# Altium PCB Bracelet.PcbDoc
Units mm, origin at the board's own origin, x right, y up, seen from the top; angles counter-clockwise.
Board outline 55 x 50 mm, 4 copper layers (Top Layer, Internal Plane 1, Internal Plane 2, Bottom Layer), stack 0.462 mm thick; 36 components, 54 nets, 165 pads, 80 vias.
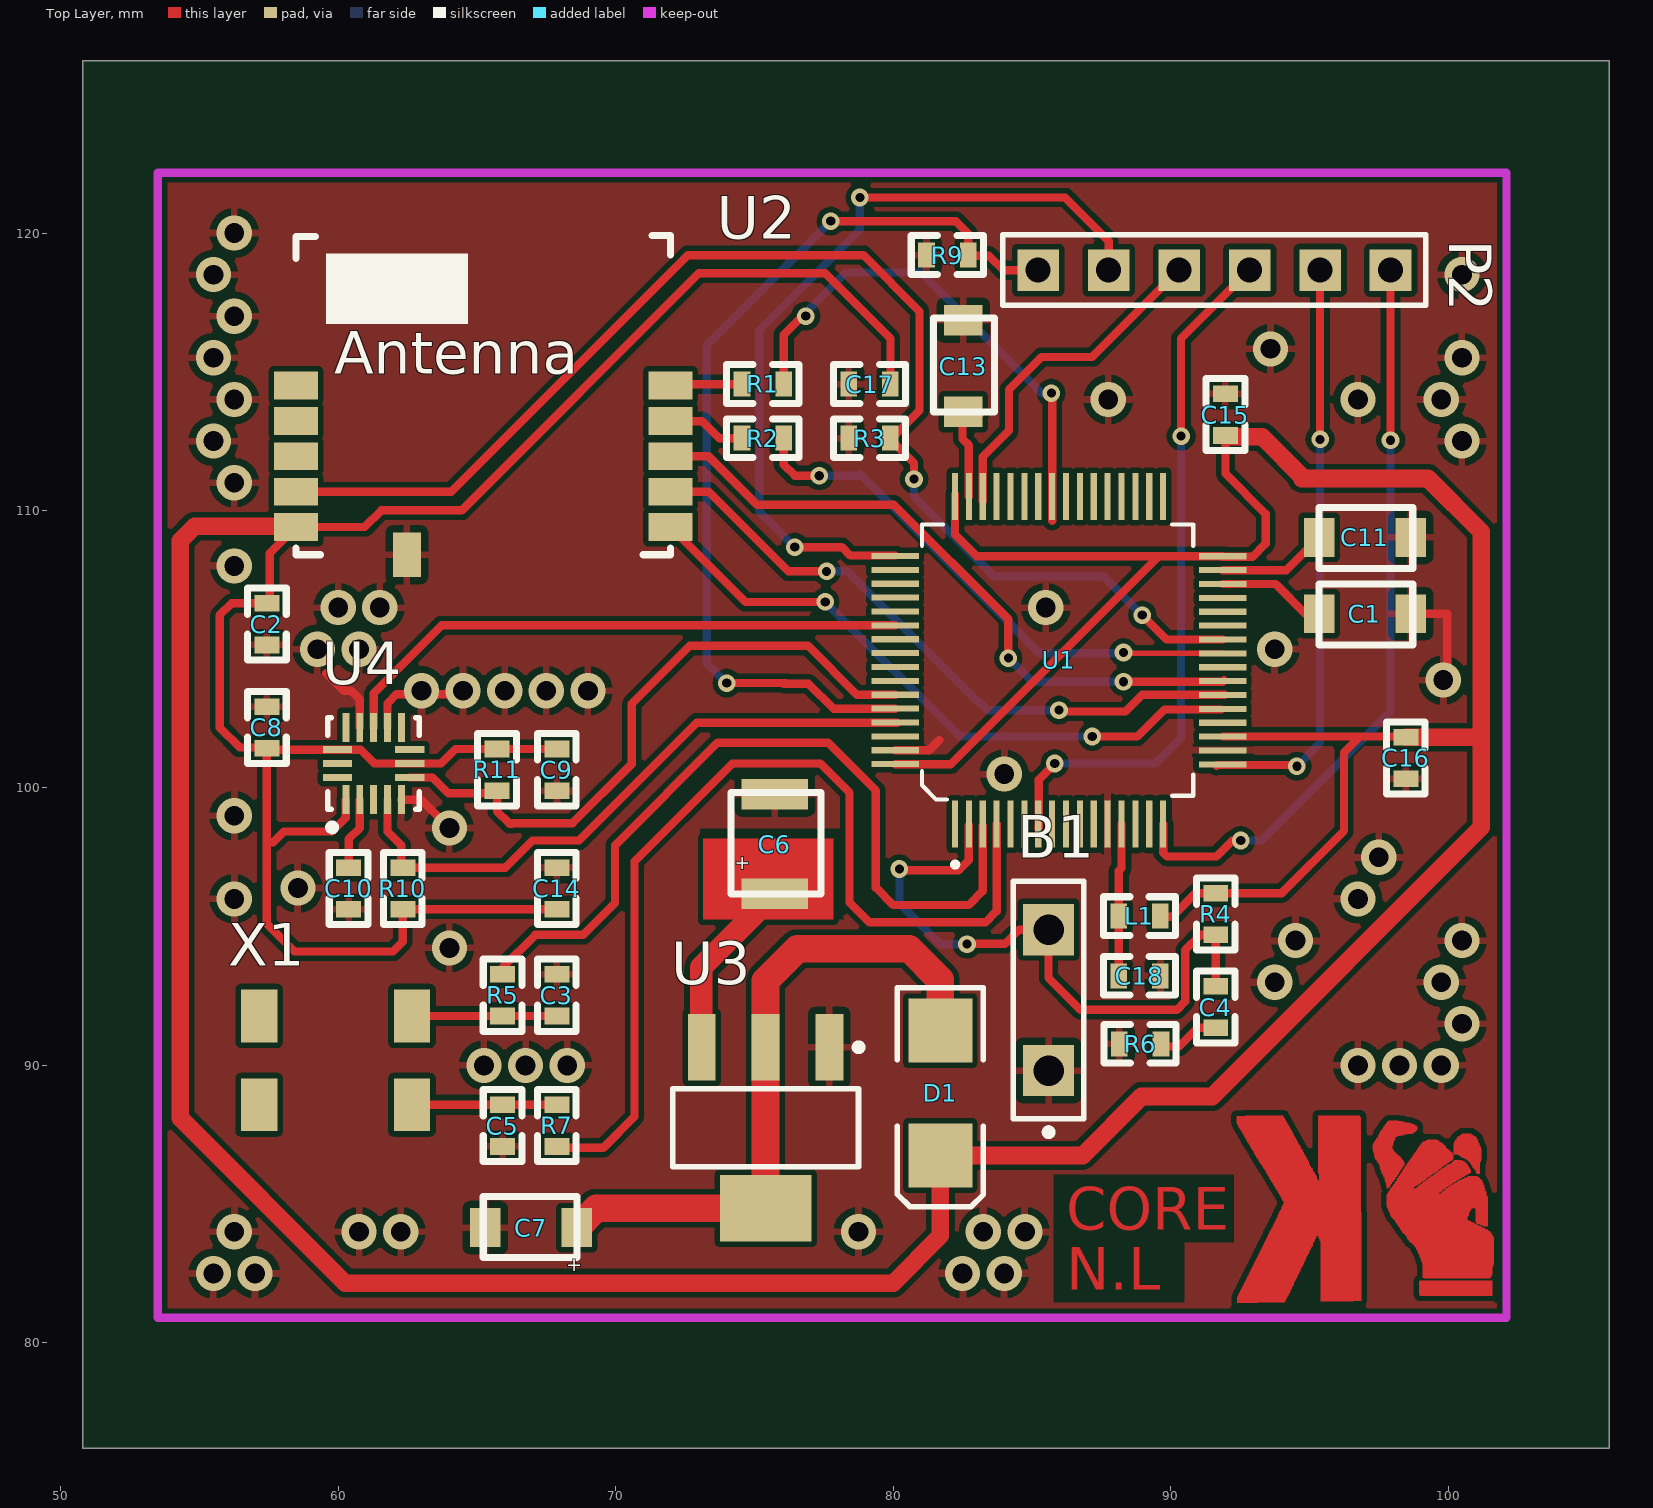
[diagram p0: Top Layer view]
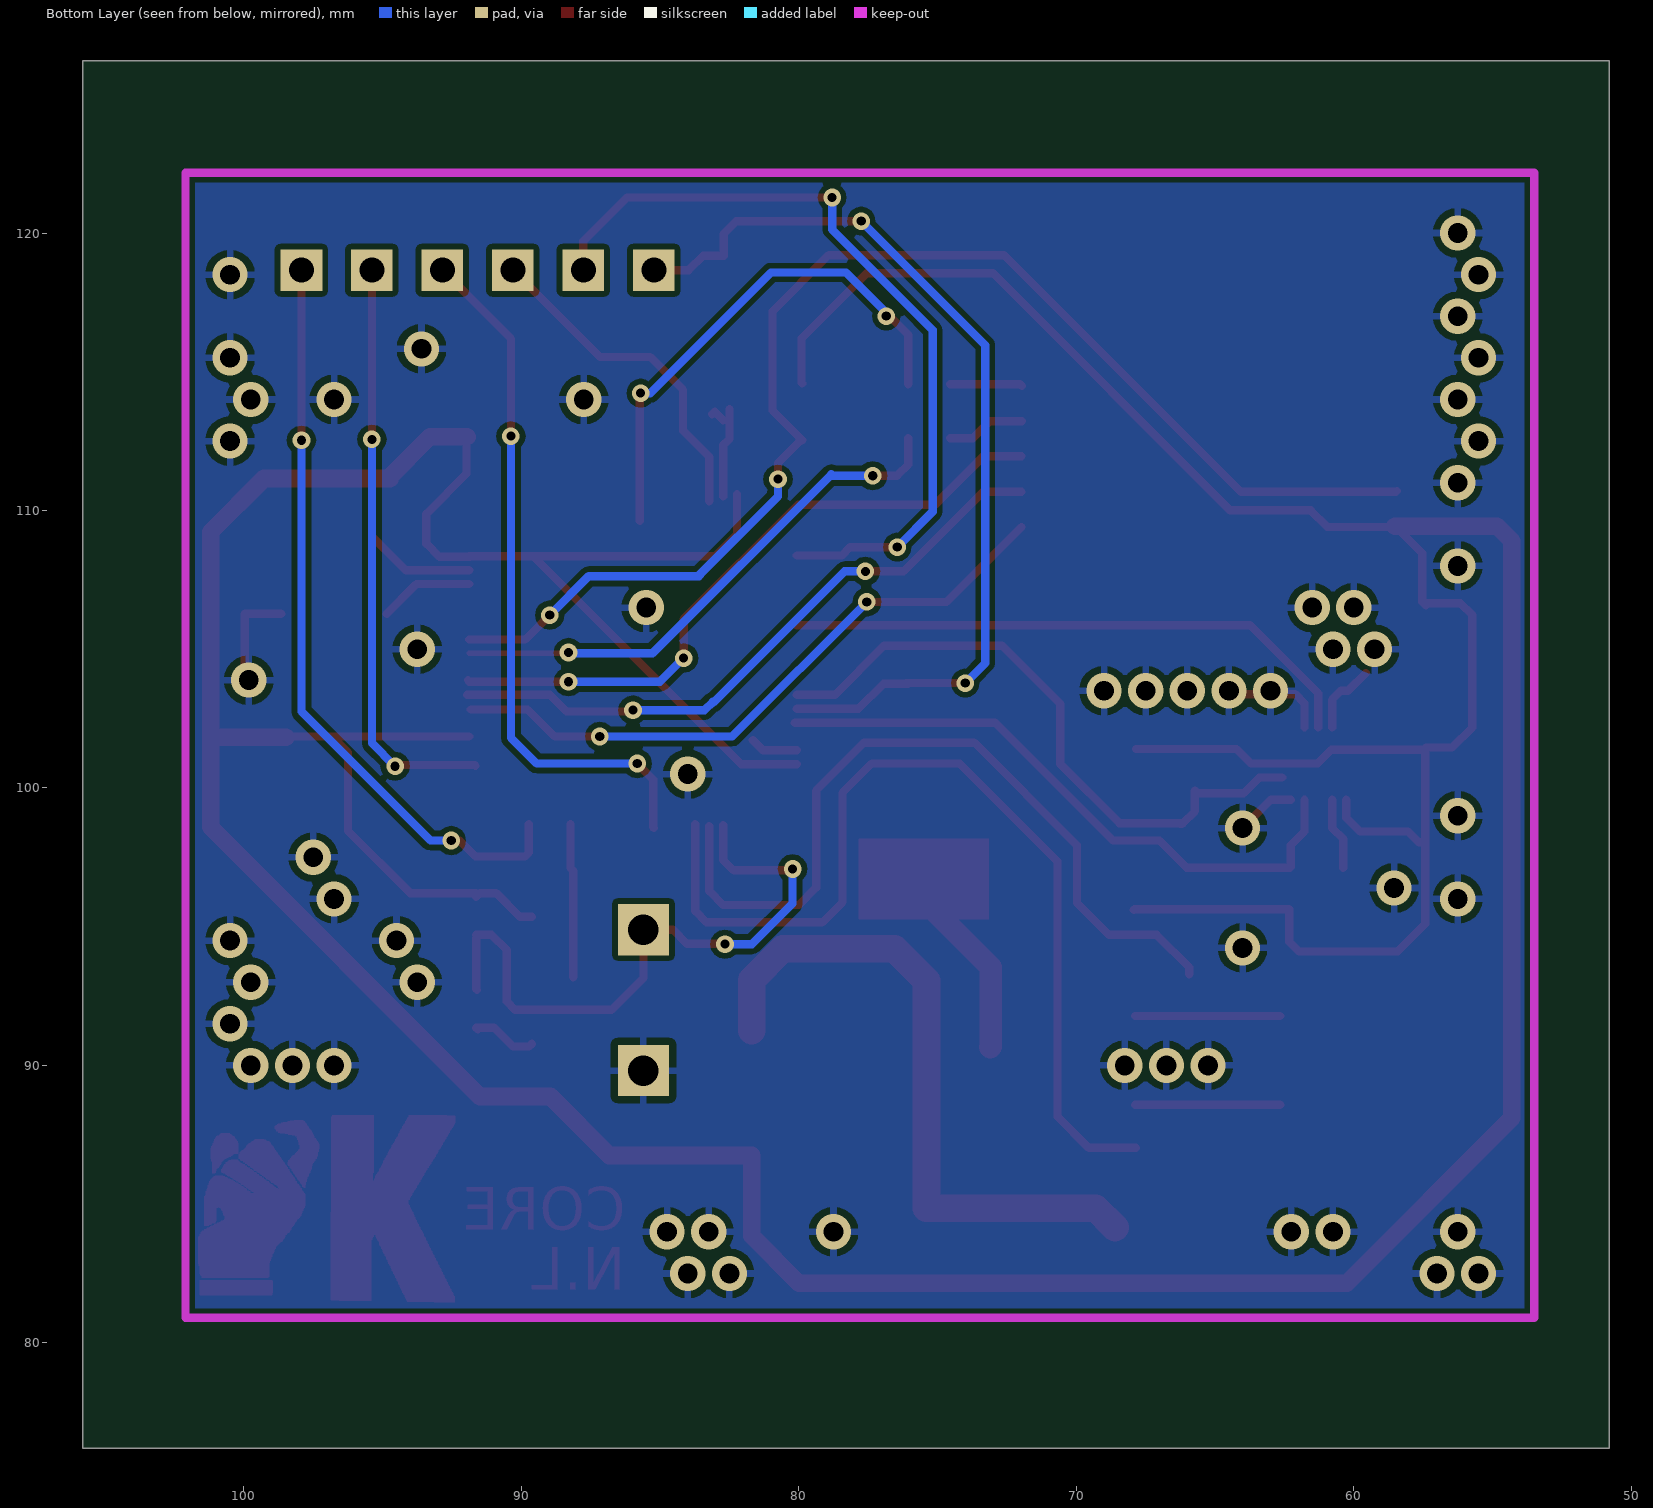
[diagram p1: Bottom Layer view, seen from below]
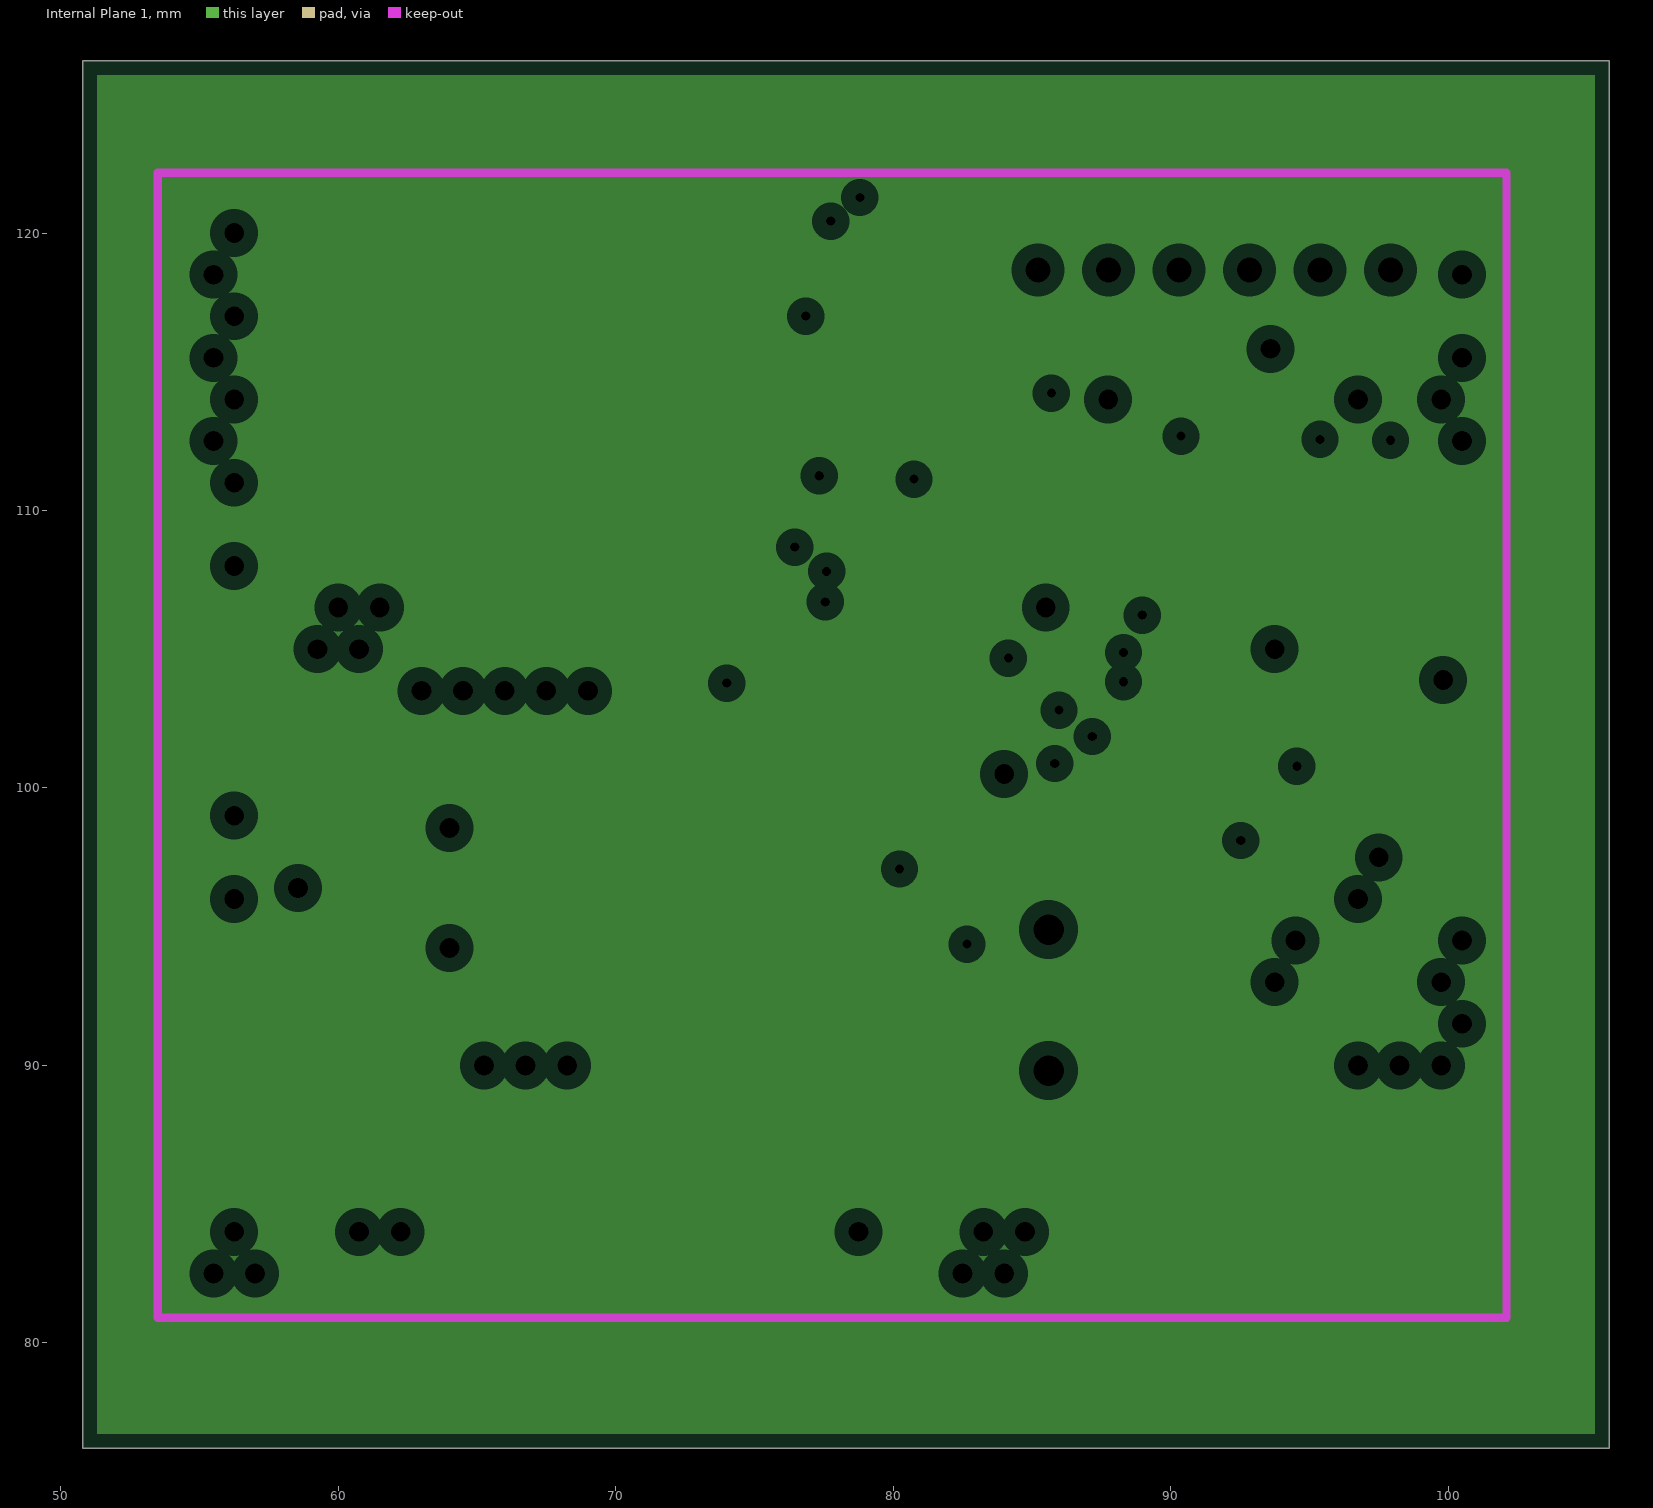
[diagram p2: Internal Plane 1, clearances drawn from the general rule]
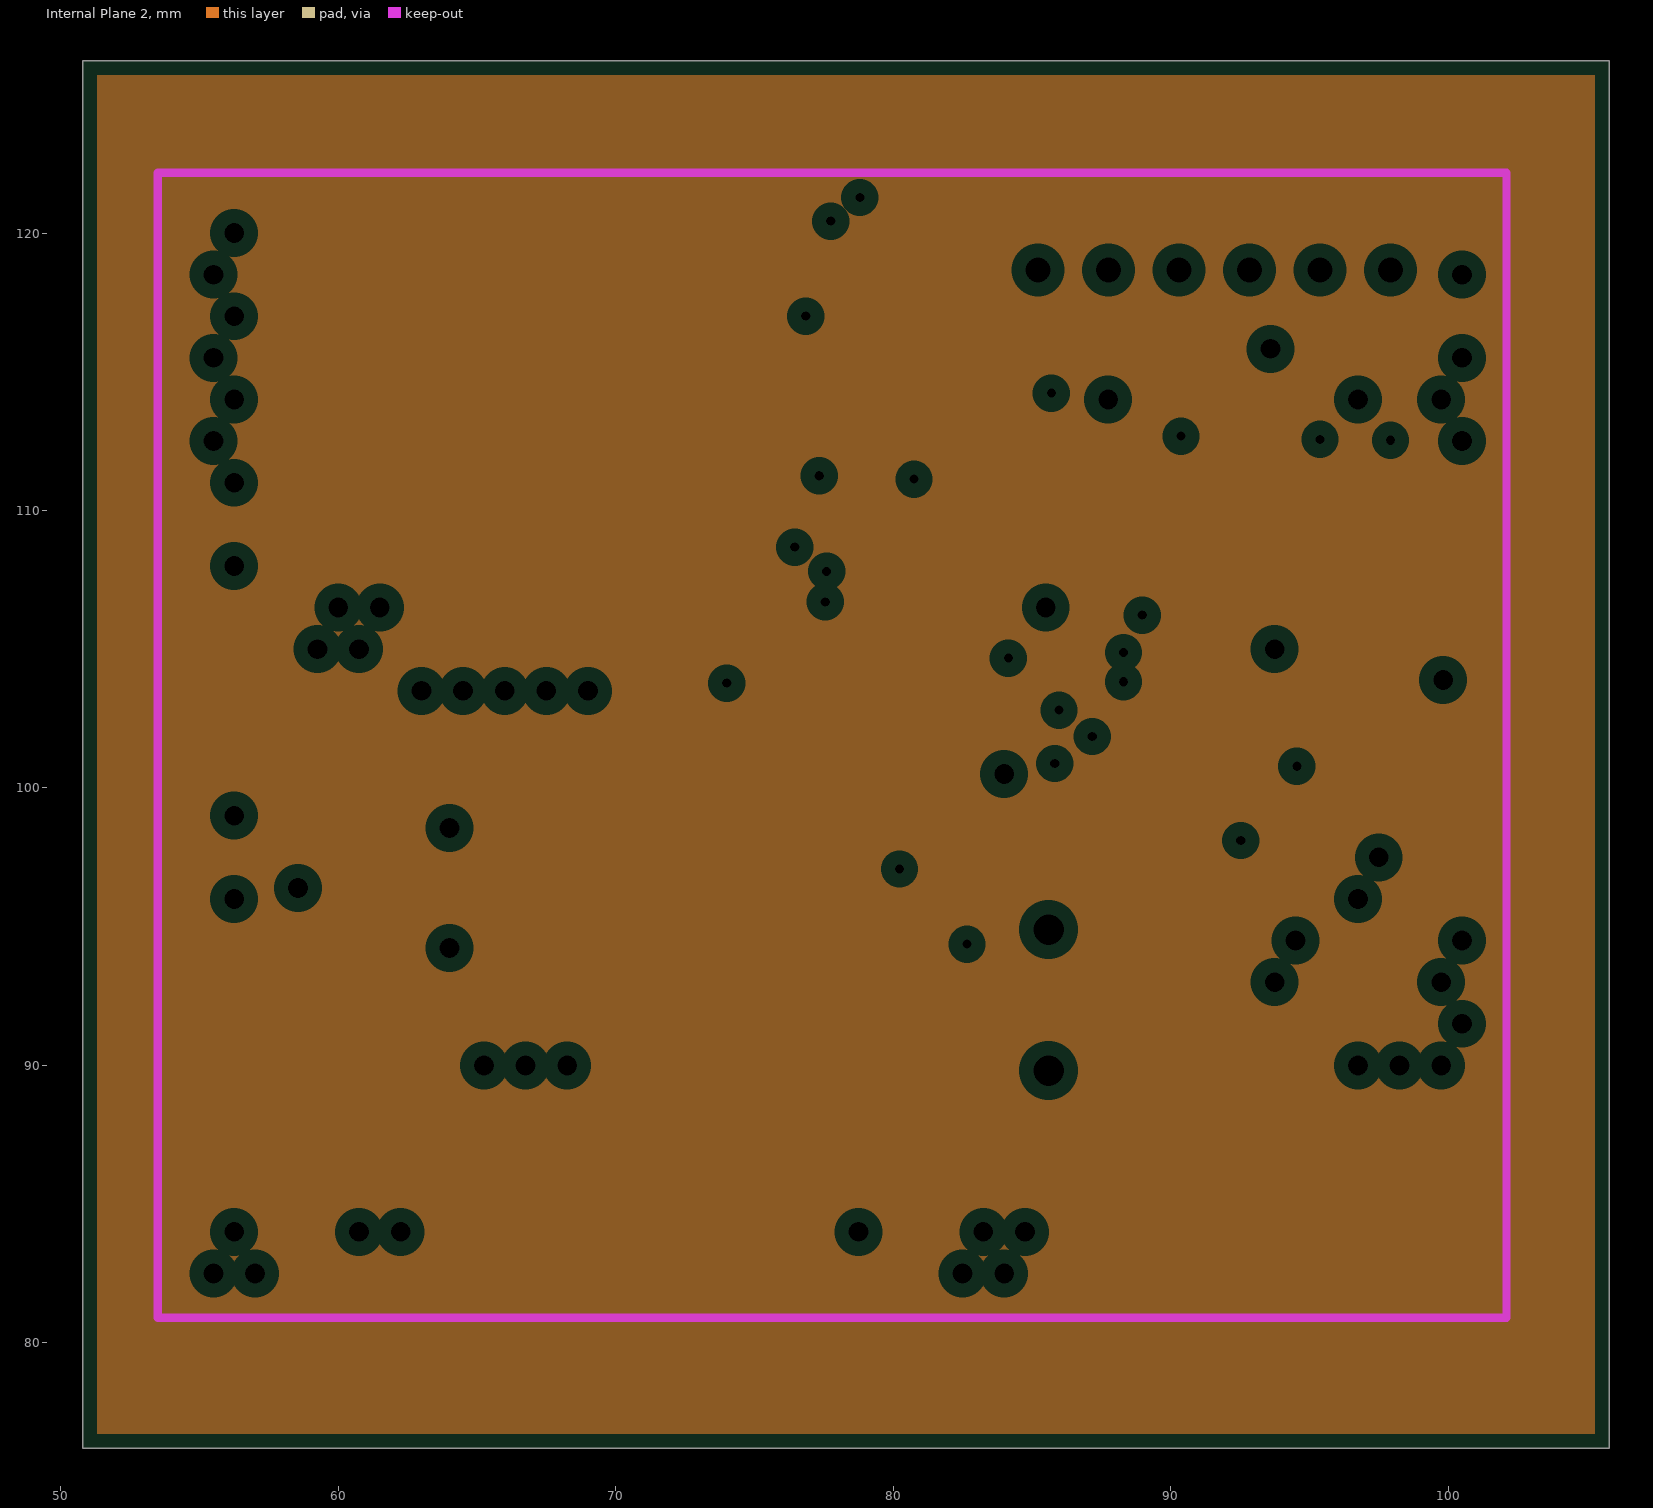
[diagram p3: Internal Plane 2, clearances drawn from the general rule]
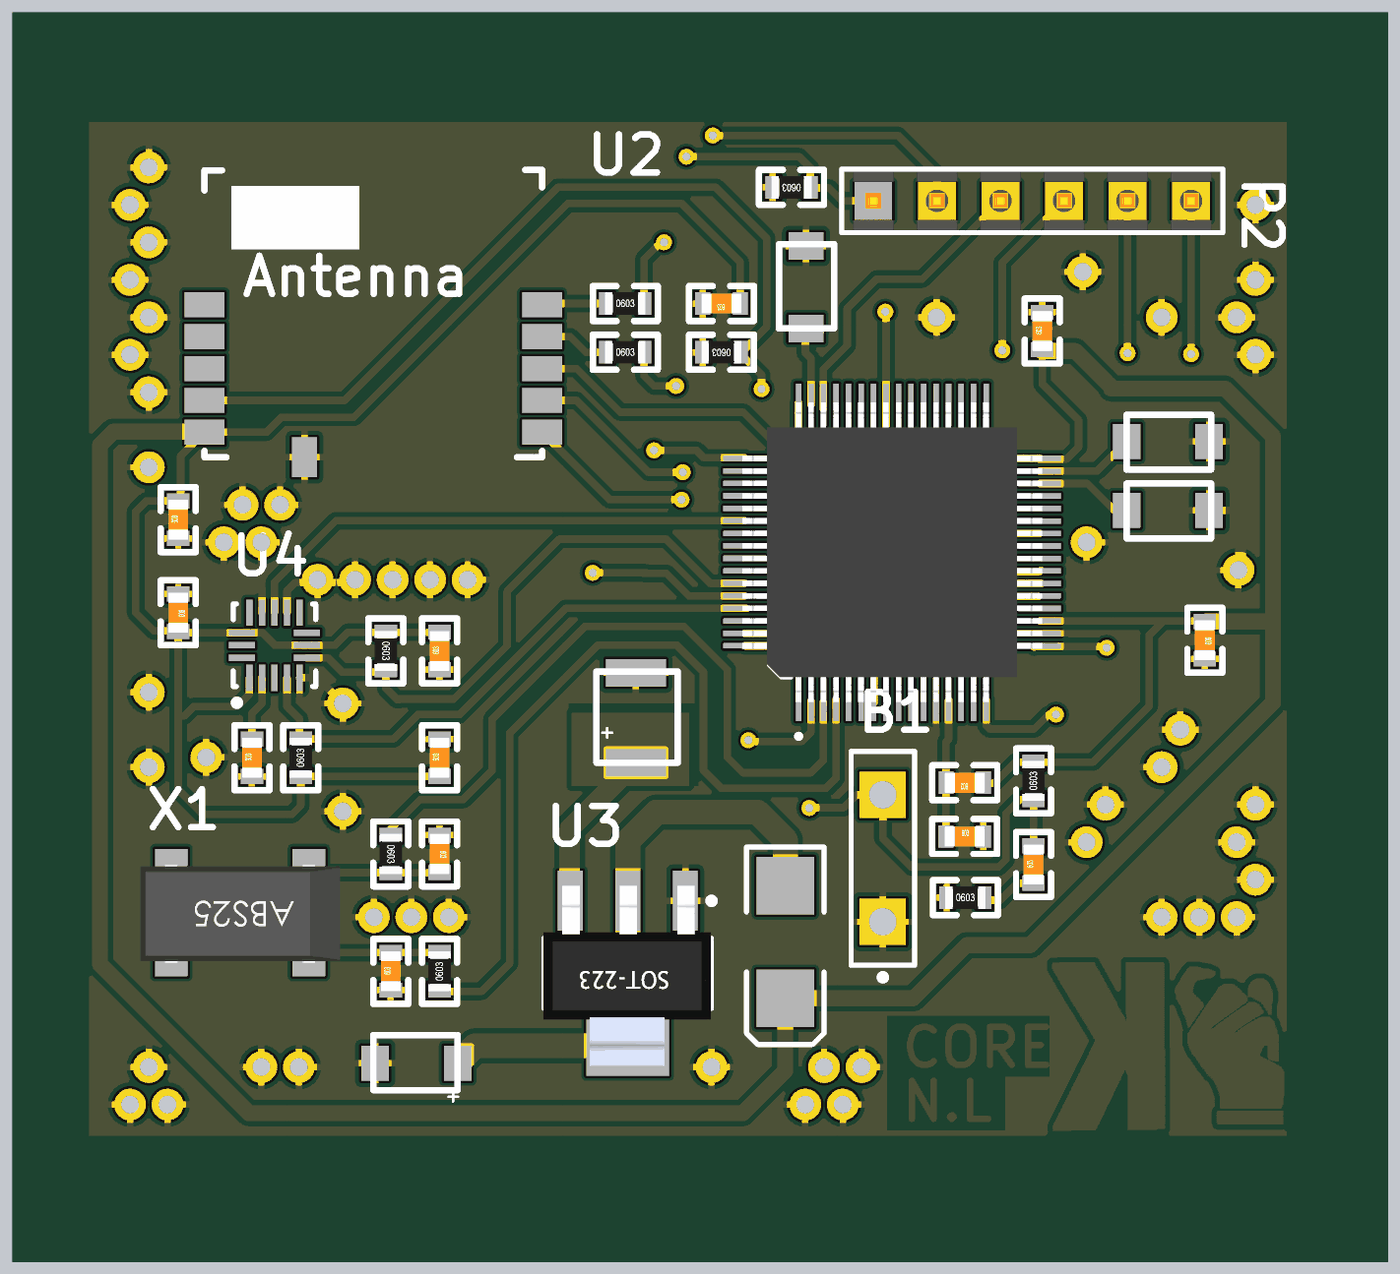
[diagram p4: 3D render of the assembled board from above, using the file's embedded part models]

## Layer stack, top to bottom
Top Solder: solder mask 0.0102, Solder Resist, Dk 3.5
Top Layer: signal copper 0.0356
Internal Plane 1: plane copper 0.0356
Internal Plane 2: plane copper 0.0356
Dielectric 1: dielectric 0.32, FR-4, Dk 4.8
Bottom Layer: signal copper 0.0356
Bottom Solder: solder mask 0.0102, Solder Resist, Dk 3.5

## Board outline
50.8,76.2 105.8,76.2 105.8,126.2 50.8,126.2

## Design rules (kind name [scope] priority, off if disabled: settings)
Clearance [All] p1: gap=0.2 ignorepadtopadclearanceinfootprint=FALSE
PlaneClearance [All] p1: clearance=0.508
PlaneConnect [All] p1: planeconnectstyle=Relief reliefexpansion=0.508 reliefentries=4 reliefconductorwidth=0.254 reliefairgap=0.254
PolygonConnect [All] p1: connectstyle=Relief reliefconductorwidth=0.254 reliefentries=4 polygonreliefangle="90 Angle" airgapwidth=0.254
RoutingVias [All] p1: holewidth=0.6 width=1 viastyle="Through Hole" minholewidth=0.711 minwidth=1.27 maxholewidth=0.711 maxwidth=1.27
SolderMaskExpansion [All] p1: expansion=0.102
Width [All] p1: maxlimit=1 minlimit=0.3 preferedwidth=0.3 minimp=50.000000 maximp=50.000000 favimp=50.000000
28 further rules are at their usual default settings.

## Components (designator, comment, footprint, x,y, rotation, side; value= is the part's Value field where it differs from the comment)
B1 "SW-PB" SPST-2 85.601,92.354 r90 top
C1 "4.7uF" TAN-A 95.951,106.254 r0 top value=2.2uF
C2 "Cap" 0603[IMP]-CAP 57.426,105.154 r90 top value=1uF
C3 "Cap" 0603[IMP]-CAP 67.876,93.279 r270 top value=4.3pF
C4 "Cap" 0603[IMP]-CAP 91.626,91.354 r90 top value=100nF
C5 "Cap" 0603[IMP]-CAP 65.926,87.079 r90 top value=4.3pF
C6 "10uF(25V)" TAN-B 75.751,98.054 r90 top value=10uF
C7 "10uF" TAN-A 68.001,84.179 r180 top
C8 "Cap" 0603[IMP]-CAP 57.426,102.929 r270 top value=4.7uF
C9 "Cap" 0603[IMP]-CAP 67.876,99.904 r90 top value=0.1uF
C10 "Cap" 0603[IMP]-CAP 60.376,95.629 r90 top value=0.1uF
C11 "2.2uF" TAN-A 95.951,109.004 r0 top
C13 "2.2uF" TAN-A 82.551,114.154 r90 top
C14 "Cap" 0603[IMP]-CAP 67.876,95.629 r90 top value=100nF
C15 "Cap" 0603[IMP]-CAP 91.976,112.704 r90 top value=100nF
C16 "Cap" 0603[IMP]-CAP 98.476,101.829 r270 top value=100nF
C17 "Cap" 0603[IMP]-CAP 79.901,114.554 r180 top value=100nF
C18 "Cap" 0603[IMP]-CAP 88.126,93.229 r0 top value=100nF
D1 "" SMB 81.701,89.004 r270 top
L1 "" 0603[IMP]-CAP 89.628,95.378 r180 top value=10mH
P2 "Header 6" HDR1X6 85.226,118.661 r0 top
R1 "Res1" 0603[IMP]-RES 74.551,114.554 r0 top value=10K
R2 "Res1" 0603[IMP]-RES 74.551,112.604 r0 top value=10K
R3 "Res1" 0603[IMP]-RES 79.901,112.604 r180 top value=47K
R4 "Res1" 0603[IMP]-RES 91.626,94.704 r90 top value=4K7
R5 "Res1" 0603[IMP]-RES 65.926,93.279 r270 top value=0
R6 "Res1" 0603[IMP]-RES 88.151,90.779 r0 top value=100
R7 "Res1" 0603[IMP]-RES 67.876,87.079 r90 top value=0
R9 "Res1" 0603[IMP]-RES 82.701,119.204 r180 top value=10K
R10 "Res1" 0603[IMP]-RES 62.326,95.629 r90 top value=10K
R11 "Res1" 0603[IMP]-RES 65.726,101.404 r270 top value=10K
U1 "MCU_LQFP64" LQFP64 85.976,104.604 r90 top
U2 "SPBTLE-RF" SPBTLE-RF 84.326,116.954 r0 top
U3 "LD1117S50TR" SOT223_N 75.401,87.752 r270 top
U4 "MMA8452QT" MMA8452QT 61.276,100.879 r90 top
X1 "32.768K[N/A]" Quartz_ABS25 62.652,88.583 r180 top

## Footprints (in the part's own frame and the unit in brackets; to place one, negate y for a bottom-side part, rotate by r counter-clockwise, add the part's x,y. Pads: shape width x height; smd on the part's side, far side on the other; paste and mask are expansions set on the pad)
0603[IMP]-CAP [mm] "Chip Resistor, Body 2.0x1.2mm, IPC Medium Density"
  rect 0.6x0.9 smd: 1(0,0) 2(1.5,0)
  silkscreen extent -0.55,-0.7 2.05,0.7, body extent -0.05,-0.4 1.55,0.4, height 0.3
0603[IMP]-RES [mm] "Chip Resistor, Body 2.0x1.2mm, IPC Medium Density"
  rect 0.6x0.9 smd: 1(0,0) 2(1.5,0)
  silkscreen extent -0.55,-0.7 2.05,0.7, body extent -0.05,-0.45 1.55,0.45, height 0.5
HDR1X6 [mm] "Connector; Header; 6 Position"
  rect 1.5x1.5 hole 0.9: 1(0,0) 2(2.54,0) 3(5.08,0) 4(7.62,0) 5(10.16,0) 6(12.7,0)
  silkscreen extent -1.27,-1.27 13.97,1.27, body extent -1.27,-1.27 13.97,1.27, height 3.2
LQFP64 [mm]
  rect 1.7x0.22 smd: 1(-5.901,3.747) 2(-5.901,3.247) 3(-5.901,2.747) 4(-5.901,2.247) 5(-5.901,1.747) 6(-5.901,1.247) 7(-5.901,0.747) 8(-5.901,0.247) 9(-5.901,-0.253) 10(-5.901,-0.753) 11(-5.901,-1.253) 12(-5.901,-1.753) 13(-5.901,-2.253) 14(-5.901,-2.753) 15(-5.901,-3.253) 16(-5.901,-3.753) 33(5.902,-3.753) 34(5.902,-3.253) 35(5.902,-2.753) 36(5.902,-2.253) 37(5.902,-1.753) 38(5.902,-1.253) 39(5.902,-0.753) 40(5.902,-0.253) 41(5.902,0.247) 42(5.902,0.747) 43(5.902,1.247) 44(5.902,1.747) 45(5.902,2.247) 46(5.902,2.747) 47(5.902,3.247) 48(5.902,3.747)
  rect 0.22x1.7 smd: 17(-3.753,-5.901) 18(-3.253,-5.901) 19(-2.753,-5.901) 20(-2.253,-5.901) 21(-1.753,-5.901) 22(-1.253,-5.901) 23(-0.753,-5.901) 24(-0.253,-5.901) 25(0.247,-5.901) 26(0.747,-5.901) 27(1.247,-5.901) 28(1.747,-5.901) 29(2.247,-5.901) 30(2.747,-5.901) 31(3.247,-5.901) 32(3.747,-5.901) 49(3.754,5.902) 50(3.254,5.902) 51(2.754,5.902) 52(2.254,5.902) 53(1.754,5.902) 54(1.254,5.902) 55(0.754,5.902) 56(0.254,5.902) 57(-0.246,5.902) 58(-0.746,5.902) 59(-1.246,5.902) 60(-1.746,5.902) 61(-2.246,5.902) 62(-2.746,5.902) 63(-3.246,5.902) 64(-3.746,5.902)
  silkscreen extent -7.42,-4.84 4.89,4.94, body extent -6,-6 6,6, height 1.56
MMA8452QT [mm] "QFN, 16-Leads, Body 3,00x3,00mm, Pitch 0,50mm, Thermal Pad 0,00x1,15mm, IPC Medium Density"
  rect 1.05x0.25 smd: 1(-1.3,1) 2(-1.3,0.5) 3(-1.3,0) 4(-1.3,-0.5) 5(-1.3,-1) 9(1.3,-1) 10(1.3,-0.5) 11(1.3,0) 12(1.3,0.5) 13(1.3,1)
  rect 0.25x1.05 smd: 6(-0.5,-1.3) 7(0,-1.3) 8(0.5,-1.3) 14(0.5,1.3) 15(0,1.3) 16(-0.5,1.3)
  silkscreen extent -2.42,-1.65 1.65,1.65, body extent -1.5,-1.5 1.5,1.5, height 1
Quartz_ABS25 [mm]
  rect 1.3x1.9 smd: 1(0,-3.2) 2(5.5,-3.2) 3(5.5,0) 4(0,0)
  body extent -1.25,-3.55 6.75,0.45, height 2.7
SMB [mm] "DO-214-AA/SMB; 2 C-Bend Leads; Body 5.3 x 3.6 mm, inc. leads (LxW)"
  rect 2.3x2.3 smd: 1(-2.25,0) 2(2.25,0)
  silkscreen extent -3.8,-1.55 4.1,1.55
SOT223_N [mm] "SOT223, 4-Leads, Body 6.5x3.5mm, Pitch 2.3mm, Lead Span 7mm, IPC Medium Density"
  rect 2.4x1 smd: 1(-2.9,2.3) 2(-2.9,0) 3(-2.9,-2.3)
  rect 2.4x3.3 smd: 4(2.9,0)
  silkscreen extent -3.02,-3.35 1.4,3.48, body extent -3.5,-3.37 3.7,3.33, height 1.85
SPBTLE-RF [mm] "Module BlueNRG"
  rect 1.6x1 smd: 1(-25.85,-2.45) 2(-25.85,-3.725) 3(-25.85,-5) 4(-25.85,-6.275) 5(-25.85,-7.55) 7(-12.35,-7.55) 8(-12.35,-6.275) 9(-12.35,-5) 10(-12.35,-3.725) 11(-12.35,-2.45)
  rect 1x1.6 smd: 6(-21.85,-8.55)
  silkscreen extent -25.85,-8.55 -12.35,2.95, body extent -25.88,-8.6 -12.35,2.93, height 1.2
SPST-2 [mm] "Switch; 2 Leads"
  rect 1.85x1.85 hole 1.1: 1(-2.54,0) 2(2.54,0)
  silkscreen extent -4.89,-1.27 4.28,1.27
TAN-A [mm]
  rect 1.1x1.4 smd: 1(-0.6,0.025) 2(2.7,0.025)
  silkscreen extent -0.6,-1.1 2.77,1.1
TAN-B [mm]
  rect 1.1x2.4 smd: 1(-1.875,0.025) 2(1.725,0.025)
  silkscreen extent -1.87,-1.65 1.77,1.6

## Part data
B1: "Switch", LatestRevisionDate=17-Jul-2002, LatestRevisionNote="Re-released for DXP Platform.", PackageDescription="Switch; 2 Leads", PackageReference=SPST-2, Published=24-Mar-1999, Publisher="Altium Limited"
C1: library part Cap_2.2uF_X7R_10%_0805, "Capacitor,4.7uF,25V, X7R,10%,1206,YAGEO", Manuf_1=YAGEO, Manuf_Part_1=CC0805KKX7R7BB225, Order=CC0805KKX7R7BB225, Revision="July-2002: Re-released for DXP Platform."
C2 C3 C4 C5 C8 C9 C10 C14 C15 C16 C17 C18: "Capacitor"
C6 C7: library part "Cap Pol1", "Polarized Capacitor (Radial)", Published=8-Jun-2000, Publisher="Altium Limited", Revision="July-2002: Re-released for DXP Platform."
C11 C13: library part Cap_2.2uF_X7R_10%_0805, "Capacitor,2.2uF,16V, X7R,10%,0805,YAGEO", Manuf_1=YAGEO, Manuf_Part_1=CC0805KKX7R7BB225, Order=CC0805KKX7R7BB225, Revision="July-2002: Re-released for DXP Platform."
D1: library part "D Schottky", "Schottky Diode", Code_JEDEC=DO-214-AA, LatestRevisionDate=17-Jul-2002, LatestRevisionNote="Re-released for DXP Platform.", PackageDescription="DO-214-AA/SMB; 2 C-Bend Leads; Body 5.3 x 3.6 mm, inc. leads (LxW)", PackageReference=SMB, Published=8-Jun-2000, Publisher="Altium Limited"
L1: library part Inductor, "Inductor", Code_IEC=1005, Code_JEITA=0402, LatestRevisionDate=29-May-2009, LatestRevisionNote="IPC-7351 Footprint Added.", PackageDescription="Chip Inductor", PackageReference=0402-A, Published=8-Jun-2000, Publisher="Altium Limited"
P2: "Header, 6-Pin", LatestRevisionDate=17-Jul-2002, LatestRevisionNote="Re-released for DXP Platform.", Publisher="Altium Limited"
R1 R2 R3 R4 R5 R6 R7 R9 R10 R11: "Resistor", LatestRevisionDate=17-Jul-2002, LatestRevisionNote="Re-released for DXP Platform.", PackageDescription="Axial Device, Thru-Hole; 2 Leads; 0.3 in Pin Spacing", PackageReference=AXIAL-0.3, Published=8-Jun-2000, Publisher="Altium Limited"
U2: "Module BlueNRG"
U3: library part LD1117
X1: library part MC306

## Via types
v1: diameter 1.27, hole 0.711, Top Layer to Bottom Layer, 56 vias
v2: diameter 0.635, hole 0.33, Top Layer to Bottom Layer, 24 vias

## Nets (pads, with @x,y where several pads share a name; then routed paths per layer and width w, separated by ;. In a path a pad name is that pad's centre, name@x,y a point inside that pad or via, vN(x,y) a via of type N, cw(c..) or ccw(c..) an arc to the next point about the centre after c; other vN are vias at no path point)
AVDD: C18.1 L1.2 U1.13 | length 5.6
  Top Layer w0.3: C18.1@88.126,93.179 88.126,95.376 L1.2 ; L1.2@88.126,95.354 88.126,97.004 88.229,97.107 U1.13
BOOT0: P2.1 R9.1 U1.60 | length 34
  Top Layer w0.3: v2(74.001,103.779) 76.126,103.779 ; 76.051,103.754 76.951,103.754 77.847,102.858 U1.60 ; v2(77.751,120.429) 82.251,120.429 82.701,119.979 82.701,119.179 83.451,119.179 83.969,118.661 P2.1
  Bottom Layer w0.3: v2(74.001,103.779) 73.276,104.504 73.276,115.954 v2(77.751,120.429)
BYP: C10.2 U4.2 | length 2.6
  Top Layer w0.3: C10.2 60.376,98.154 60.776,98.554 U4.2
CLK: U1.21 U2.7 | length 23.4
  Top Layer w0.3: U2.7 74.676,106.704 v2(77.551,106.704) ; v2(87.176,101.854) 88.801,101.854 89.776,102.829 U1.21@91.826,102.829
  Bottom Layer w0.3: v2(77.551,106.704) 82.401,101.854 v2(87.176,101.854)
CSN: R2.2 U1.25 | length 19.6
  Top Layer w0.2: v2@88.301,104.854 88.304,104.851 U1.25
  Top Layer w0.3: R2.2 76.051,111.655 76.454,111.252 v2(77.337,111.252)
  Bottom Layer w0.3: v2(77.337,111.252) 78.774,111.252 78.826,111.304 85.276,104.854 88.276,104.854 v2(88.301,104.879)
GND: B1.1 C1.2 C2.1 C3.1 C5.1 C6.2 C7.2 C8.1 C9.1 C10.1 C11.2 C13.2 C14.2 C15.2 C16.2 C17.2 C18.2 R3.2 R6.1 R9.2 U1.12 U1.18 U1.63 U2.6 U3.1 U4.5 U4.10 U4.12 | length 13.5
  Top Layer w0.3: 59.563,104.14 60.198,103.505 60.452,103.505 60.776,103.181 U4.12 ; U4.10 61.776,103.051 62.103,103.378 v1@64.008,103.378 ; U4.5 62.981,99.579 v1(64.008,98.552) ; U1.63 81.292,101.358 81.661,101.727 ; C1.2 99.969,106.279 99.969,104.033 v1(99.822,103.886)
  other v1: 55.5,82.5 57,82.5 82.5,82.5 84,82.5 56.25,84 60.75,84 62.25,84 78.75,84 83.25,84 84.75,84 65.25,90 66.75,90 68.25,90 96.75,90 98.25,90 99.75,90 100.5,91.5 93.75,93 99.75,93 64.008,94.234 94.5,94.5 100.5,94.5 56.25,96 96.75,96 58.547,96.393 97.5,97.5 56.25,99 84,100.5 63,103.5 64.5,103.5 66,103.5 67.5,103.5 69,103.5 59.25,105 60.75,105 93.75,105 60,106.5 61.5,106.5 85.5,106.5 56.25,108 56.25,111 55.5,112.5 100.5,112.5 56.25,114 87.75,114 96.75,114 99.75,114 55.5,115.5 100.5,115.5 93.599,115.824 56.25,117 55.5,118.5 100.5,118.5 56.25,120
INT1: U1.54 U4.11 | length 21
  Top Layer w0.3: U4.11 61.276,103.404 63.73,105.858 U1.54
INT2: U4.9
MISO: U1.22 U2.8 | length 23.5
  Top Layer w0.3: U2.8 73.351,110.679 76.226,107.804 v2(77.601,107.804) ; v2(85.976,102.804) 86.026,102.754 88.376,102.754 88.976,103.354 U1.22@91.951,103.354
  Bottom Layer w0.3: v2(77.601,107.804) 78.351,107.804 83.076,103.079 83.101,103.104 83.401,102.804 v2(85.976,102.804)
MOSI: U1.23 U2.9 | length 24.2
  Top Layer w0.3: U2.9 73.351,111.954 75.101,110.204 80.026,110.204 84.151,106.079 v2(84.151,104.679) ; v2@88.276,103.829 91.876,103.829 U1.23@91.926,103.879
  Bottom Layer w0.3: v2(84.151,104.679) 85.001,103.829 v2@88.276,103.829
  other v2: 88.301,103.829
NetC3_2: C3.2 R5.2 X1.1 | length 5.3
  Top Layer w0.3: X1.1 65.872,91.783 R5.2@65.876,91.779 ; R5.2@65.826,91.779 R5.2@65.876,91.779 ; C3.2@67.872,91.783 C3.2 R5.2 R5.2@65.876,91.779
NetC4_1: C4.1 R6.2 | length 2.4
  Top Layer w0.3: R6.2@89.626,90.779 89.726,90.679 90.301,90.679 90.976,91.354 C4.1 C4.1@91.576,91.304
NetC5_2: C5.2 R7.2 X1.4 | length 5.2
  Top Layer w0.3: X1.4@62.651,88.579 65.876,88.579 C5.2 R7.2 R7.2@67.872,88.583
NetR1_1: R1.1 U2.11 | length 2.6
  Top Layer w0.3: U2.11@71.969,114.494 72.029,114.554 R1.1
NetR2_1: R2.1 U2.10 | length 2.8
  Top Layer w0.3: U2.10@71.969,113.219 73.111,113.219 73.726,112.604 R2.1
NRST: P2.4 U1.7 | length 25.4
  Top Layer w0.3: U1.7@85.226,98.554 85.251,98.579 85.251,100.304 v2(85.826,100.879) ; v2(90.376,112.679) 90.376,116.191 P2.4
  Bottom Layer w0.3: v2(85.826,100.879) 89.451,100.879 90.376,101.804 v2(90.376,112.679)
PA4: U1.20
PA9: U1.42
PA11: U1.44
PA12: U1.45
PA15: U1.50
PB2: U1.28
PB4: U1.56
PB5: U1.57
PB6: U1.58
PB10: U1.29
PB11: C1.1 U1.30 | length 3.4
  Top Layer w0.3: U1.30 93.779,107.351 ; 93.825,107.305 C1.1@94.851,106.279
PC0: U1.8
PC1: U1.9
PC3: U1.11
PC4: U1.24
PC6: U1.37
PC7: U1.38
PC8: U1.39
PC9: U1.40
PC10: U1.51
PC11: U1.52
PC12: U1.53
PC13: B1.2 C4.2 R4.1 U1.2 | length 23.6
  Top Layer w0.3: v2(80.226,97.079) 80.276,97.029 82.351,97.029 82.726,97.404 U1.2@82.726,98.654 ; v2@82.651,94.379 84.026,94.379 84.541,94.894 B1.2 ; B1.2@85.601,94.854 85.601,93.154 86.751,92.004 90.226,92.004 90.526,92.304 90.526,94.154 91.076,94.704 R4.1 ; C4.2@91.601,92.729 91.626,92.754 R4.1@91.626,94.579
  Bottom Layer w0.3: v2(80.226,97.079) 80.226,95.829 81.686,94.369 v2(82.661,94.369)
PC14: R5.1 U1.3 | length 29.2
  Top Layer w0.3: R5.1 65.926,93.529 67.101,94.704 68.826,94.704 69.976,95.854 69.976,97.929 73.676,101.629 77.651,101.629 79.376,99.904 79.376,96.404 80.001,95.779 82.726,95.779 83.226,96.279 U1.3@83.226,98.629
PC15: R7.1 U1.4 | length 35
  Top Layer w0.3: R7.1@67.851,87.029 69.551,87.029 70.676,88.154 70.676,97.354 74.201,100.879 77.376,100.879 78.426,99.829 78.426,95.879 79.151,95.154 83.326,95.154 83.729,95.557 U1.4
RESETN: R1.2 U1.41 | length 18.9
  Top Layer w0.3: R1.2 76.051,116.329 76.726,117.004 v2(76.851,117.004) ; 85.729,109.631 v2@85.729,114.254
  Bottom Layer w0.3: v2(76.851,117.004) 76.851,117.129 78.301,118.579 81.001,118.579 85.351,114.229 v2(85.701,114.229)
SCL: R10.2 U1.61 U4.4 | length 22.7
  Top Layer w0.3: U4.4 61.776,98.429 62.276,97.929 62.276,97.154 R10.2@62.301,97.129 ; R10.2 66.026,97.129 67.001,98.104 68.676,98.104 72.926,102.354 U1.61@80.151,102.354
SDA: R11.2 U1.59 U4.6 | length 23.5
  Top Layer w0.3: U4.6 63.401,100.379 63.976,99.804 65.626,99.804 R11.2 65.726,99.154 66.151,98.729 ; 66.251,98.704 66.176,98.704 66.151,98.729 ; U1.59 78.697,103.358 76.926,105.129 72.676,105.129 70.576,103.029 70.576,100.854 68.451,98.729 66.151,98.729
SPI_IRQ: R3.1 U1.26 U2.4 | length 47.8
  Top Layer w0.3: U2.4@58.451,110.704 U2.4 64.076,110.679 72.601,119.204 78.926,119.204 80.951,117.179 80.951,113.604 R3.1@79.901,112.554 ; R3.1@79.876,112.529 R3.1@79.901,112.554 ; v2(80.751,111.129) 80.751,111.704 R3.1@79.901,112.554 ; v2(88.976,106.229) 89.854,105.351 U1.26
  Bottom Layer w0.3: v2(80.751,111.129) 80.751,110.504 83.626,107.629 ; 83.526,107.729 83.626,107.629 ; 83.576,107.654 83.601,107.629 83.626,107.629 ; v2(88.976,106.229) 87.576,107.629 83.626,107.629
SWCLK: P2.2 U1.49 | length 29
  Top Layer w0.3: v2(76.451,108.679) 78.151,108.679 78.451,108.379 U1.49@80.076,108.379 ; v2(78.801,121.279) 86.201,121.279 87.766,119.714 P2.2
  Bottom Layer w0.3: v2(76.451,108.679) 75.176,109.954 75.176,116.504 78.801,120.129 v2(78.801,121.279)
SWDIO: P2.3 U1.46 | length 12.3
  Top Layer w0.3: U1.46@83.226,110.329 83.226,111.929 84.176,112.879 84.176,114.354 85.351,115.529 87.174,115.529 P2.3
USART_RX: P2.5 U1.17 | length 20.8
  Top Layer w0.3: U1.17@91.651,100.804 91.676,100.829 v2@94.251,100.829 ; v2(95.386,112.564) P2.5
  Bottom Layer w0.3: v2(94.551,100.779) 95.386,101.614 v2(95.386,112.564)
USART_TX: P2.6 U1.16 | length 27.4
  Top Layer w0.3: U1.16 89.729,97.676 89.876,97.529 91.651,97.529 92.226,98.104 v2(92.526,98.104) ; v2(97.926,112.529) P2.6
  Bottom Layer w0.3: v2(92.526,98.104) 93.276,98.104 97.926,102.754 v2(97.926,112.529)
VCAP1: C11.1 U1.31 | length 4
  Top Layer w0.3: U1.31 94.173,107.851 C11.1
VCAP2: C13.1 U1.47 | length 3.8
  Top Layer w0.3: C13.1@82.501,113.654 82.501,112.579 82.729,112.351 U1.47 ; C13.1@82.729,113.257 82.776,113.304 83.026,113.554 C13.1@83.116,113.464
VDD: C2.2 C8.2 C9.2 C14.1 C15.1 C16.1 C17.1 D1.2 L1.1 R4.2 R10.1 R11.1 U1.19 U1.32 U1.48 U1.64 U2.5 U4.1 U4.7 U4.14 | length 227.9
  Top Layer w0.3: C8.2@57.376,101.454 56.451,101.454 55.726,102.179 55.726,106.229 56.151,106.654 C2.2 ; C2.2@57.401,106.579 57.526,106.704 57.526,108.454 U2.5 60.951,109.404 61.551,110.004 64.451,110.004 73.001,118.554 77.551,118.554 79.901,116.204 79.901,114.604 C17.1@79.876,114.579 ; C8.2@57.426,101.404 57.426,98.044 ; C8.2 57.476,101.379 U4.14 60.801,101.379 61.301,100.879 U4.7@62.651,100.879 ; U4.1 60.276,98.929 59.776,98.429 58.043,98.429 57.658,98.044 57.426,98.044 ; U4.7 63.701,100.879 64.226,101.404 C9.2@67.851,101.404 ; C14.1@67.926,95.604 67.901,95.629 R10.1 62.326,94.457 61.976,94.107 58.42,94.107 57.426,95.101 57.426,98.044 ; U1.64 82.08,100.858 89.576,108.354 ; U1.48@82.226,110.579 82.226,109.129 83.001,108.354 89.576,108.354 ; L1.1@89.626,95.354 90.051,95.354 90.901,96.204 91.501,96.204 R4.2@91.626,96.079 ; R4.2 94.001,96.204 96.251,98.454 96.251,101.279 96.801,101.829 ; U1.32@91.851,108.329 92.951,108.329 93.426,108.804 93.426,109.879 91.976,111.329 C15.1@91.976,112.654 ; U1.19 96.251,101.851 ; U1.32@91.901,108.354 89.576,108.354 ; 96.251,101.854 96.251,101.851 ; C16.1@98.501,101.854 98.498,101.851 96.251,101.851
  Top Layer w0.635: U2.5@58.526,109.429 54.826,109.429 54.301,108.904 54.301,88.104 60.251,82.154 80.001,82.154 81.701,83.854 D1.2 86.826,86.754 88.951,88.879 91.501,88.879 101.201,98.579 101.201,109.229 99.276,111.154 94.801,111.154 ; C15.1@91.951,112.654 91.976,112.654 93.301,112.654 94.801,111.154 ; 94.726,111.154 94.801,111.154 ; C16.1 101.051,101.829 101.101,101.879
VIN: C6.1 U3.3 | length 6.6
  Top Layer w0.813: U3.3 73.076,90.677 73.076,93.529 C6.1
VOUT: C7.1 D1.1 U3.2 U3.4 | length 24.4
  Top Layer w1: C7.1 69.299,84.852 U3.4 U3.2 75.401,93.054 76.551,94.204 80.576,94.204 81.701,93.079 D1.1
pads on no net: U1.1 U1.5 U1.6 U1.10 U1.14 U1.15 U1.27 U1.33 U1.34 U1.35 U1.36 U1.43 U1.55 U1.62 U2.1 U2.2 U2.3 U4.3 U4.8 U4.13 U4.15 U4.16 X1.2 X1.3
copper on no net: | length 1528.3
  Top Layer w0.025: 92.38,87.935 94.183,87.935 ; 92.38,87.96 94.183,87.96 ; 92.38,87.986 94.158,87.986 ; 92.38,88.011 94.158,88.011 ; 92.38,88.036 94.132,88.036 ; 92.38,88.062 94.107,88.062 ; 92.38,88.087 94.107,88.087 ; 92.38,88.113 94.082,88.113 ; 92.38,88.138 94.082,88.138 ; 92.38,88.163 94.056,88.163 ; 92.405,81.458 93.142,81.458 ; 92.405,81.483 94.107,81.483 ; 92.405,81.509 94.132,81.509 ; 92.405,81.534 94.132,81.534 ; 92.405,81.559 94.158,81.559 ; 92.405,81.585 94.158,81.585 ; 92.405,81.61 94.183,81.61 ; 92.405,81.636 94.183,81.636 ; 92.405,81.661 94.209,81.661 ; 92.405,87.884 94.209,87.884 ; 92.405,87.909 94.209,87.909 ; 92.431,81.686 94.209,81.686 ; 92.431,81.712 94.234,81.712 ; 92.431,87.833 94.259,87.833 ; 92.431,87.859 94.234,87.859 ; 92.456,81.737 94.234,81.737 ; 92.456,81.763 94.259,81.763 ; 92.456,87.782 94.285,87.782 ; 92.456,87.808 94.259,87.808 ; 92.481,81.788 94.259,81.788 ; 92.481,81.813 94.285,81.813 ; 92.481,87.757 94.285,87.757 ; 92.507,81.839 94.285,81.839 ; 92.507,81.864 94.31,81.864 ; 92.507,87.706 94.31,87.706 ; 92.507,87.732 94.31,87.732 ; 92.532,81.89 94.31,81.89 ; 92.532,81.915 94.336,81.915 ; 92.532,87.681 94.336,87.681 ; 92.558,81.94 94.336,81.94 ; 92.558,81.966 94.361,81.966 ; 92.558,87.63 94.361,87.63 ; 92.558,87.655 94.361,87.655 ; 92.583,81.991 94.361,81.991 ; 92.583,82.017 94.386,82.017 ; 92.583,87.579 94.386,87.579 ; 92.583,87.605 94.386,87.605 ; 92.608,82.042 94.386,82.042 ; 92.608,82.067 94.412,82.067 ; 92.608,87.528 94.412,87.528 ; 92.608,87.554 94.412,87.554 ; 92.634,82.093 94.412,82.093 ; 92.634,82.118 94.437,82.118 ; 92.634,87.503 94.437,87.503 ; 92.659,82.144 94.437,82.144 ; 92.659,82.169 94.437,82.169 ; 92.659,87.452 94.463,87.452 ; 92.659,87.478 94.437,87.478 ; 92.685,82.194 94.463,82.194 ; 92.685,82.22 94.463,82.22 ; 92.685,87.401 94.488,87.401 ; 92.685,87.427 94.463,87.427 ; 92.685,88.189 94.056,88.189 ; 92.71,82.245 94.488,82.245 ; 92.71,82.271 94.488,82.271 ; 92.71,87.351 94.513,87.351 ; 92.71,87.376 94.488,87.376 ; 92.735,82.296 94.513,82.296 ; 92.735,82.321 94.513,82.321 ; 92.735,87.3 94.539,87.3 ; 92.735,87.325 94.539,87.325 ; 92.761,82.347 94.539,82.347 ; 92.761,82.372 94.539,82.372 ; 92.761,87.274 94.564,87.274 ; 92.786,82.398 94.564,82.398 ; 92.786,82.423 94.564,82.423 ; 92.786,87.224 94.59,87.224 ; 92.786,87.249 94.564,87.249 ; 92.812,82.448 94.59,82.448 ; 92.812,82.474 94.59,82.474 ; 92.812,87.198 94.59,87.198 ; 92.837,82.499 94.615,82.499 ; 92.837,82.525 94.615,82.525 ; 92.837,87.147 94.64,87.147 ; 92.837,87.173 94.615,87.173 ; 92.862,82.55 94.64,82.55 ; 92.862,82.575 94.64,82.575 ; 92.862,87.097 94.666,87.097 ; 92.862,87.122 94.64,87.122 ; 92.888,82.601 94.666,82.601 ; 92.888,82.626 94.666,82.626 ; 92.888,87.071 94.666,87.071 ; 92.913,82.652 94.691,82.652 ; 92.913,82.677 94.691,82.677 ; 92.913,87.02 94.691,87.02 ; 92.913,87.046 94.691,87.046 ; 92.939,82.702 94.717,82.702 ; 92.939,82.728 94.717,82.728 ; 92.939,86.97 94.742,86.97 ; 92.939,86.995 94.717,86.995 ; 92.964,82.753 94.742,82.753 ; 92.964,82.779 94.742,82.779 ; 92.964,86.944 94.742,86.944 ; 92.989,82.804 94.767,82.804 ; 92.989,82.829 94.767,82.829 ; 92.989,86.893 94.767,86.893 ; 92.989,86.919 94.767,86.919 ; 93.015,82.855 94.793,82.855 ; 93.015,82.88 94.793,82.88 ; 93.015,86.843 94.793,86.843 ; 93.015,86.868 94.793,86.868 ; 93.04,82.906 94.818,82.906 ; 93.04,82.931 94.818,82.931 ; 93.04,86.792 94.818,86.792 ; 93.04,86.817 94.818,86.817 ; 93.066,82.956 94.818,82.956 ; 93.066,82.982 94.844,82.982 ; 93.066,86.766 94.844,86.766 ; 93.091,83.007 94.844,83.007 ; 93.091,83.033 94.869,83.033 ; 93.091,86.716 94.869,86.716 ; 93.091,86.741 94.844,86.741 ; 93.116,83.058 94.869,83.058 ; 93.116,83.083 94.894,83.083 ; 93.116,86.665 94.894,86.665 ; 93.116,86.69 94.894,86.69 ; 93.142,83.109 94.894,83.109 ; 93.142,83.134 94.92,83.134 ; 93.142,86.639 94.92,86.639 ; 93.167,83.16 94.92,83.16 ; 93.167,83.185 94.945,83.185 ; 93.167,86.589 94.945,86.589 ; 93.167,86.614 94.92,86.614 ; 93.193,83.21 94.945,83.21 ; 93.193,83.236 94.971,83.236 ; 93.193,86.538 94.971,86.538 ; 93.193,86.563 94.945,86.563 ; 93.218,83.261 94.971,83.261 ; 93.218,83.287 94.996,83.287 ; 93.218,86.512 94.971,86.512 ; 93.243,83.312 94.996,83.312 ; 93.243,83.337 95.021,83.337 ; 93.243,86.462 94.996,86.462 ; 93.243,86.487 94.971,86.487 ; 93.269,83.363 95.021,83.363 ; 93.269,83.388 95.047,83.388 ; 93.269,86.436 94.996,86.436 ; 93.294,83.414 95.047,83.414 ; 93.294,83.439 95.072,83.439 ; 93.294,86.385 95.021,86.385 ; 93.294,86.411 95.021,86.411 ; 93.32,83.464 95.072,83.464 ; 93.32,83.49 95.098,83.49 ; 93.32,86.36 95.047,86.36 ; 93.345,83.515 95.098,83.515 ; 93.345,83.541 95.123,83.541 ; 93.345,86.309 95.072,86.309 ; 93.345,86.335 95.047,86.335 ; 93.37,83.566 95.123,83.566 ; 93.37,83.591 95.123,83.591 ; 93.37,86.284 95.098,86.284 ; 93.396,83.617 95.148,83.617 ; 93.396,83.642 95.148,83.642 ; 93.396,86.233 95.123,86.233 ; 93.396,86.258 95.098,86.258 ; 93.421,83.668 95.174,83.668 ; 93.421,83.693 95.174,83.693 ; 93.421,86.208 95.123,86.208 ; 93.447,83.718 95.199,83.718 ; 93.447,83.744 95.199,83.744 ; 93.447,86.157 95.174,86.157 ; 93.447,86.182 95.148,86.182 ; 93.472,83.769 95.225,83.769 ; 93.472,83.795 95.225,83.795 ; 93.472,86.106 95.199,86.106 ; 93.472,86.131 95.174,86.131 ; 93.497,83.82 95.25,83.82 ; 93.497,83.845 95.25,83.845 ; 93.497,86.055 95.225,86.055 ; 93.497,86.081 95.199,86.081 ; 93.523,83.871 95.275,83.871 ; 93.523,83.896 96.876,83.896 ; 93.523,83.922 96.876,83.922 ; 93.523,86.03 95.25,86.03 ; 93.548,83.947 96.876,83.947 ; 93.548,83.972 96.876,83.972 ; 93.548,85.979 95.275,85.979 ; 93.548,86.004 95.25,86.004 ; 93.574,83.998 96.876,83.998 ; 93.574,84.023 96.876,84.023 ; 93.574,85.928 95.275,85.928 ; 93.574,85.954 95.275,85.954 ; 93.599,84.049 96.876,84.049 ; 93.599,85.903 95.301,85.903 ; 93.624,84.074 96.876,84.074 ; 93.624,84.099 96.876,84.099 ; 93.624,85.852 95.326,85.852 ; 93.624,85.877 95.301,85.877 ; 93.65,84.125 96.876,84.125 ; 93.65,84.15 96.876,84.15 ; 93.65,85.801 96.85,85.801 ; 93.65,85.827 96.85,85.827 ; 93.675,84.176 96.876,84.176 ; 93.675,84.201 96.876,84.201 ; 93.675,85.776 96.85,85.776 ; 93.701,84.226 96.876,84.226 ; 93.701,84.252 96.876,84.252 ; 93.701,85.725 96.85,85.725 ; 93.701,85.75 96.85,85.75 ; 93.726,84.277 96.876,84.277 ; 93.726,84.303 96.876,84.303 ; 93.726,85.674 96.85,85.674 ; 93.726,85.7 96.85,85.7 ; 93.751,84.328 96.876,84.328 ; 93.751,84.353 96.876,84.353 ; 93.751,85.649 96.85,85.649 ; 93.777,84.379 96.876,84.379 ; 93.777,84.404 96.876,84.404 ; 93.777,85.598 96.85,85.598 ; 93.777,85.623 96.85,85.623 ; 93.802,84.43 96.876,84.43 ; 93.802,84.455 96.876,84.455 ; 93.802,85.547 96.85,85.547 ; 93.802,85.573 96.85,85.573 ; 93.828,84.48 96.876,84.48 ; 93.828,84.506 96.876,84.506 ; 93.828,85.522 96.85,85.522 ; 93.853,84.531 96.876,84.531 ; 93.853,84.557 96.876,84.557 ; 93.853,84.582 96.876,84.582 ; 93.853,85.471 96.85,85.471 ; 93.853,85.496 96.85,85.496 ; 93.878,84.607 96.876,84.607 ; 93.878,84.633 96.876,84.633 ; 93.878,85.42 96.85,85.42 ; 93.878,85.446 96.85,85.446 ; 93.904,84.658 96.876,84.658 ; 93.904,84.684 96.876,84.684 ; 93.904,85.395 96.85,85.395 ; 93.929,84.709 96.876,84.709 ; 93.929,84.734 96.85,84.734 ; 93.929,85.344 96.85,85.344 ; 93.929,85.369 96.85,85.369 ; 93.955,84.76 96.85,84.76 ; 93.955,84.785 96.85,84.785 ; 93.955,85.293 96.85,85.293 ; 93.955,85.319 96.85,85.319 ; 93.98,84.811 96.85,84.811 ; 93.98,84.836 96.85,84.836 ; 93.98,85.268 96.85,85.268 ; 94.005,84.861 96.85,84.861 ; 94.005,84.887 96.85,84.887 ; 94.005,85.217 96.85,85.217 ; 94.005,85.242 96.85,85.242 ; 94.031,84.912 96.85,84.912 ; 94.031,84.938 96.85,84.938 ; 94.031,85.166 96.85,85.166 ; 94.031,85.192 96.85,85.192 ; 94.056,84.963 96.85,84.963 ; 94.056,84.988 96.85,84.988 ; 94.056,85.141 96.85,85.141 ; 94.082,85.014 96.85,85.014 ; 94.082,85.039 96.85,85.039 ; 94.082,85.065 96.85,85.065 ; 94.082,85.09 96.85,85.09 ; 94.082,85.115 96.85,85.115 ; 95.301,83.871 96.876,83.871 ; 95.326,83.82 96.876,83.82 ; 95.326,83.845 96.876,83.845 ; 95.326,86.131 96.85,86.131 ; 95.326,86.157 96.85,86.157 ; 95.326,86.182 96.85,86.182 ; 95.326,86.208 96.85,86.208 ; 95.326,86.233 96.85,86.233 ; 95.326,86.258 96.85,86.258 ; 95.326,86.284 96.85,86.284 ; 95.326,86.309 96.85,86.309 ; 95.326,86.335 96.85,86.335 ; 95.326,86.36 96.85,86.36 ; 95.326,86.385 96.85,86.385 ; 95.326,86.411 96.85,86.411 ; 95.326,86.436 96.85,86.436 ; 95.326,86.462 96.85,86.462 ; 95.326,86.487 96.85,86.487 ; 95.326,86.512 96.85,86.512 ; 95.326,86.538 96.85,86.538 ; 95.326,86.563 96.85,86.563 ; 95.326,86.589 96.85,86.589 ; 95.326,86.614 96.85,86.614 ; 95.326,86.639 96.85,86.639 ; 95.326,86.665 96.85,86.665 ; 95.326,86.69 96.85,86.69 ; 95.326,86.716 96.85,86.716 ; 95.326,86.741 96.85,86.741 ; 95.326,86.766 96.85,86.766 ; 95.326,86.792 96.85,86.792 ; 95.326,86.817 96.85,86.817 ; 95.326,86.843 96.85,86.843 ; 95.326,86.868 96.85,86.868 ; 95.326,86.893 96.85,86.893 ; 95.326,86.919 96.85,86.919 ; 95.326,86.944 96.85,86.944 ; 95.326,86.97 96.85,86.97 ; 95.326,86.995 96.85,86.995 ; 95.326,87.02 96.85,87.02 ; 95.326,87.046 96.85,87.046 ; 95.326,87.071 96.85,87.071 ; 95.326,87.097 96.85,87.097 ; 95.326,87.122 96.85,87.122 ; 95.326,87.147 96.85,87.147 ; 95.326,87.173 96.85,87.173 ; 95.326,87.198 96.85,87.198 ; 95.326,87.224 96.85,87.224 ; 95.326,87.249 96.85,87.249 ; 95.326,87.274 96.85,87.274 ; 95.326,87.3 96.85,87.3 ; 95.326,87.325 96.85,87.325 ; 95.326,87.351 96.85,87.351 ; 95.326,87.376 96.85,87.376 ; 95.326,87.401 96.85,87.401 ; 95.326,87.427 96.85,87.427 ; 95.326,87.452 96.85,87.452 ; 95.326,87.478 96.85,87.478 ; 95.326,87.503 96.85,87.503 ; 95.326,87.528 96.85,87.528 ; 95.326,87.554 96.85,87.554 ; 95.326,87.579 96.85,87.579 ; 95.326,87.605 96.85,87.605 ; 95.326,87.63 96.85,87.63 ; 95.326,87.655 96.85,87.655 ; 95.326,87.681 96.85,87.681 ; 95.326,87.706 96.85,87.706 ; 95.326,87.732 96.85,87.732 ; 95.326,87.757 96.85,87.757 ; 95.326,87.782 96.85,87.782 ; 95.326,87.808 96.85,87.808 ; 95.326,87.833 96.85,87.833 ; 95.326,87.859 96.85,87.859 ; 95.326,87.884 96.85,87.884 ; 95.326,87.909 96.85,87.909 ; 95.326,87.935 96.85,87.935 ; 95.326,87.96 96.85,87.96 ; 95.326,87.986 96.85,87.986 ; 95.326,88.011 96.85,88.011 ; 95.326,88.036 96.85,88.036 ; 95.326,88.062 96.85,88.062 ; 95.326,88.087 96.85,88.087 ; 95.326,88.113 96.85,88.113 ; 95.326,88.138 96.85,88.138 ; 95.326,88.163 96.825,88.163 ; 95.326,88.189 96.825,88.189 ; 95.352,83.769 96.876,83.769 ; 95.352,83.795 96.876,83.795 ; 95.352,85.852 96.85,85.852 ; 95.352,85.877 96.85,85.877 ; 95.352,85.903 96.85,85.903 ; 95.352,85.928 96.85,85.928 ; 95.352,85.954 96.85,85.954 ; 95.352,85.979 96.85,85.979 ; 95.352,86.004 96.85,86.004 ; 95.352,86.03 96.85,86.03 ; 95.352,86.055 96.85,86.055 ; 95.352,86.081 96.85,86.081 ; 95.352,86.106 96.85,86.106 ; 95.377,83.693 96.876,83.693 ; 95.377,83.718 96.876,83.718 ; 95.377,83.744 96.876,83.744 ; 95.402,81.509 96.571,81.509 ; 95.402,81.534 96.876,81.534 ; 95.402,81.559 96.876,81.559 ; 95.402,81.585 96.876,81.585 ; 95.402,81.61 96.876,81.61 ; 95.402,81.636 96.876,81.636 ; 95.402,81.661 96.876,81.661 ; 95.402,81.686 96.876,81.686 ; 95.402,81.712 96.876,81.712 ; 95.402,81.737 96.876,81.737 ; 95.402,81.763 96.876,81.763 ; 95.402,81.788 96.876,81.788 ; 95.402,81.813 96.876,81.813 ; 95.402,81.839 96.876,81.839 ; 95.402,81.864 96.876,81.864 ; 95.402,81.89 96.876,81.89 ; 95.402,81.915 96.876,81.915 ; 95.402,81.94 96.876,81.94 ; 95.402,81.966 96.876,81.966 ; 95.402,81.991 96.876,81.991 ; 95.402,82.017 96.876,82.017 ; 95.402,82.042 96.876,82.042 ; 95.402,82.067 96.876,82.067 ; 95.402,82.093 96.876,82.093 ; 95.402,82.118 96.876,82.118 ; 95.402,82.144 96.876,82.144 ; 95.402,82.169 96.876,82.169 ; 95.402,82.194 96.876,82.194 ; 95.402,82.22 96.876,82.22 ; 95.402,82.245 96.876,82.245 ; 95.402,82.271 96.876,82.271 ; 95.402,82.296 96.876,82.296 ; 95.402,82.321 96.876,82.321 ; 95.402,82.347 96.876,82.347 ; 95.402,82.372 96.876,82.372 ; 95.402,82.398 96.876,82.398 ; 95.402,82.423 96.876,82.423 ; 95.402,82.448 96.876,82.448 ; 95.402,82.474 96.876,82.474 ; 95.402,82.499 96.876,82.499 ; 95.402,82.525 96.876,82.525 ; 95.402,82.55 96.876,82.55 ; 95.402,82.575 96.876,82.575 ; 95.402,82.601 96.876,82.601 ; 95.402,82.626 96.876,82.626 ; 95.402,82.652 96.876,82.652 ; 95.402,82.677 96.876,82.677 ; 95.402,82.702 96.876,82.702 ; 95.402,82.728 96.876,82.728 ; 95.402,82.753 96.876,82.753 ; 95.402,82.779 96.876,82.779 ; 95.402,82.804 96.876,82.804 ; 95.402,82.829 96.876,82.829 ; 95.402,82.855 96.876,82.855 ; 95.402,82.88 96.876,82.88 ; 95.402,82.906 96.876,82.906 ; 95.402,82.931 96.876,82.931 ; 95.402,82.956 96.876,82.956 ; 95.402,82.982 96.876,82.982 ; 95.402,83.007 96.876,83.007 ; 95.402,83.033 96.876,83.033 ; 95.402,83.058 96.876,83.058 ; 95.402,83.083 96.876,83.083 ; 95.402,83.109 96.876,83.109 ; 95.402,83.134 96.876,83.134 ; 95.402,83.16 96.876,83.16 ; 95.402,83.185 96.876,83.185 ; 95.402,83.21 96.876,83.21 ; 95.402,83.236 96.876,83.236 ; 95.402,83.261 96.876,83.261 ; 95.402,83.287 96.876,83.287 ; 95.402,83.312 96.876,83.312 ; 95.402,83.337 96.876,83.337 ; 95.402,83.363 96.876,83.363 ; 95.402,83.388 96.876,83.388 ; 95.402,83.414 96.876,83.414 ; 95.402,83.439 96.876,83.439 ; 95.402,83.464 96.876,83.464 ; 95.402,83.49 96.876,83.49 ; 95.402,83.515 96.876,83.515 ; 95.402,83.541 96.876,83.541 ; 95.402,83.566 96.876,83.566 ; 95.402,83.591 96.876,83.591 ; 95.402,83.617 96.876,83.617 ; 95.402,83.642 96.876,83.642 ; 95.402,83.668 96.876,83.668 ; 97.282,86.97 98.019,86.97 ; 97.282,86.995 97.993,86.995 ; 97.282,87.02 97.993,87.02 ; 97.282,87.046 97.993,87.046 ; 97.282,87.071 97.993,87.071 ; 97.282,87.097 97.993,87.097 ; 97.282,87.122 97.993,87.122 ; 97.282,87.147 98.019,87.147 ; 97.307,86.893 98.069,86.893 ; 97.307,86.919 98.044,86.919 ; 97.307,86.944 98.019,86.944 ; 97.307,87.173 98.019,87.173 ; 97.307,87.198 98.019,87.198 ; 97.333,86.741 98.247,86.741 ; 97.333,86.766 98.196,86.766 ; 97.333,86.792 98.171,86.792 ; 97.333,86.817 98.146,86.817 ; 97.333,86.843 98.12,86.843 ; 97.333,86.868 98.095,86.868 ; 97.333,87.224 98.019,87.224 ; 97.333,87.249 98.044,87.249 ; 97.358,86.69 98.298,86.69 ; 97.358,86.716 98.273,86.716 ; 97.358,87.274 98.044,87.274 ; 97.384,86.639 98.323,86.639 ; 97.384,86.665 98.298,86.665 ; 97.384,87.3 98.044,87.3 ; 97.409,86.614 98.349,86.614 ; 97.409,87.325 98.069,87.325 ; 97.409,87.351 98.069,87.351 ; 97.434,86.563 98.4,86.563 ; 97.434,86.589 98.374,86.589 ; 97.434,87.376 98.095,87.376 ; 97.46,86.512 98.425,86.512 ; 97.46,86.538 98.4,86.538 ; 97.46,87.401 98.095,87.401 ; 97.46,87.427 98.095,87.427 ; 97.485,86.487 98.425,86.487 ; 97.485,87.452 98.171,87.452 ; 97.485,87.478 98.273,87.478 ; 97.511,86.436 98.425,86.436 ; 97.511,86.462 98.425,86.462 ; 97.511,87.503 98.4,87.503 ; 97.511,87.528 98.501,87.528 ; 97.511,87.554 98.704,87.554 ; 97.536,86.36 98.374,86.36 ; 97.536,86.385 98.4,86.385 ; 97.536,86.411 98.425,86.411 ; 97.536,87.579 98.755,87.579 ; 97.561,86.258 98.298,86.258 ; 97.561,86.284 98.323,86.284 ; 97.561,86.309 98.349,86.309 ; 97.561,86.335 98.349,86.335 ; 97.561,87.605 98.781,87.605 ; 97.561,87.63 98.831,87.63 ; 97.587,86.182 98.247,86.182 ; 97.587,86.208 98.273,86.208 ; 97.587,86.233 98.273,86.233 ; 97.587,87.655 98.857,87.655 ; 97.612,86.131 98.222,86.131 ; 97.612,86.157 98.247,86.157 ; 97.612,87.681 98.857,87.681 ; 97.638,86.081 98.196,86.081 ; 97.638,86.106 98.196,86.106 ; 97.638,87.706 98.882,87.706 ; 97.638,87.732 98.882,87.732 ; 97.663,86.03 98.146,86.03 ; 97.663,86.055 98.171,86.055 ; 97.663,87.757 98.882,87.757 ; 97.688,85.979 98.12,85.979 ; 97.688,86.004 98.146,86.004 ; 97.688,87.782 98.882,87.782 ; 97.688,87.808 98.882,87.808 ; 97.714,85.903 98.069,85.903 ; 97.714,85.928 98.095,85.928 ; 97.714,85.954 98.095,85.954 ; 97.714,87.833 98.857,87.833 ; 97.739,85.801 97.993,85.801 ; 97.739,85.827 98.019,85.827 ; 97.739,85.852 98.044,85.852 ; 97.739,85.877 98.044,85.877 ; 97.739,87.859 98.806,87.859 ; 97.739,87.884 98.755,87.884 ; 97.765,85.7 97.917,85.7 ; 97.765,85.725 97.942,85.725 ; 97.765,85.75 97.968,85.75 ; 97.765,85.776 97.968,85.776 ; 97.765,87.909 98.679,87.909 ; 97.79,84.938 101.422,84.938 ; 97.79,84.963 101.422,84.963 ; 97.79,84.988 101.422,84.988 ; 97.79,85.014 101.422,85.014 ; 97.79,85.039 101.422,85.039 ; 97.79,85.065 101.422,85.065 ; 97.79,85.09 101.422,85.09 ; 97.79,85.115 101.422,85.115 ; 97.79,85.141 101.422,85.141 ; 97.79,85.166 101.422,85.166 ; 97.79,85.192 101.422,85.192 ; 97.79,85.217 101.422,85.217 ; 97.79,85.242 101.422,85.242 ; 97.79,85.268 101.422,85.268 ; 97.79,85.293 101.397,85.293 ; 97.79,85.319 101.397,85.319 ; 97.79,85.344 101.371,85.344 ; 97.79,85.598 97.841,85.598 ; 97.79,85.623 97.892,85.623 ; 97.79,85.649 97.892,85.649 ; 97.79,85.674 97.917,85.674 ; 97.79,87.935 98.603,87.935 ; 97.815,84.861 100.889,84.861 ; 97.815,84.887 101.422,84.887 ; 97.815,84.912 101.422,84.912 ; 97.815,85.369 101.371,85.369 ; 97.815,87.96 98.425,87.96 ; 97.841,84.811 100.813,84.811 ; 97.841,84.836 100.838,84.836 ; 97.841,85.395 99.644,85.395 ; 97.841,85.42 99.67,85.42 ; 97.841,87.986 98.323,87.986 ; 97.866,84.734 100.762,84.734 ; 97.866,84.76 100.787,84.76 ; 97.866,84.785 100.813,84.785 ; 97.866,85.446 99.72,85.446 ; 97.866,85.471 99.746,85.471 ; 97.866,88.011 98.196,88.011 ; 97.892,84.684 100.762,84.684 ; 97.892,84.709 100.762,84.709 ; 97.892,85.496 99.771,85.496 ; 97.917,84.633 100.736,84.633 ; 97.917,84.658 100.736,84.658 ; 97.917,85.522 99.822,85.522 ; 97.917,85.547 98.73,85.547 ; 97.942,84.582 100.711,84.582 ; 97.942,84.607 100.736,84.607 ; 97.942,85.573 98.755,85.573 ; 97.968,84.531 100.686,84.531 ; 97.968,84.557 100.711,84.557 ; 97.968,85.598 98.755,85.598 ; 97.968,85.623 98.781,85.623 ; 97.993,84.506 100.686,84.506 ; 97.993,85.649 98.806,85.649 ; 98.019,84.48 100.686,84.48 ; 98.019,85.674 98.857,85.674 ; 98.019,85.7 98.882,85.7 ; 98.044,84.455 100.686,84.455 ; 98.044,85.725 98.933,85.725 ; 98.069,84.43 100.711,84.43 ; 98.069,85.75 98.958,85.75 ; 98.095,84.379 100.813,84.379 ; 98.095,84.404 100.762,84.404 ; 98.095,85.776 99.009,85.776 ; 98.095,85.801 99.035,85.801 ; 98.12,84.353 100.863,84.353 ; 98.12,85.827 99.06,85.827 ; 98.146,84.303 100.965,84.303 ; 98.146,84.328 100.914,84.328 ; 98.146,85.852 99.111,85.852 ; 98.146,85.877 99.136,85.877 ; 98.171,84.277 101.016,84.277 ; 98.171,85.903 99.187,85.903 ; 98.171,85.928 99.212,85.928 ; 98.196,84.226 101.117,84.226 ; 98.196,84.252 101.067,84.252 ; 98.196,85.954 99.238,85.954 ; 98.222,84.201 101.168,84.201 ; 98.222,85.979 99.289,85.979 ; 98.222,86.004 99.314,86.004 ; 98.247,84.176 101.219,84.176 ; 98.247,86.03 99.339,86.03 ; 98.273,84.125 101.321,84.125 ; 98.273,84.15 101.27,84.15 ; 98.273,86.055 99.39,86.055 ; 98.298,84.074 101.422,84.074 ; 98.298,84.099 101.371,84.099 ; 98.298,86.081 99.416,86.081 ; 98.298,86.106 99.466,86.106 ; 98.323,84.049 101.448,84.049 ; 98.323,86.131 99.492,86.131 ; 98.349,83.998 101.524,83.998 ; 98.349,84.023 101.498,84.023 ; 98.349,86.157 99.543,86.157 ; 98.349,86.182 99.568,86.182 ; 98.374,83.972 101.549,83.972 ; 98.374,86.208 99.619,86.208 ; 98.374,86.233 99.644,86.233 ; 98.4,83.947 101.549,83.947 ; 98.4,86.258 99.67,86.258 ; 98.425,86.284 99.72,86.284 ; 98.425,86.309 99.746,86.309 ; 98.45,83.896 101.6,83.896 ; 98.45,83.922 101.575,83.922 ; 98.45,86.335 99.771,86.335 ; 98.45,86.36 99.797,86.36 ; 98.476,83.871 101.6,83.871 ; 98.476,86.385 99.847,86.385 ; 98.501,83.82 101.625,83.82 ; 98.501,83.845 101.625,83.845 ; 98.501,86.411 99.873,86.411 ; 98.501,86.436 99.898,86.436 ; 98.527,83.769 101.651,83.769 ; 98.527,83.795 101.651,83.795 ; 98.527,86.462 99.949,86.462 ; 98.552,83.744 101.651,83.744 ; 98.552,86.487 99.974,86.487 ; 98.577,83.718 101.651,83.718 ; 98.577,86.512 100.025,86.512 ; 98.577,86.538 100.051,86.538 ; 98.603,83.668 101.651,83.668 ; 98.603,83.693 101.651,83.693 ; 98.603,86.563 100.101,86.563 ; 98.628,83.642 101.651,83.642 ; 98.628,86.589 100.127,86.589 ; 98.628,86.614 100.152,86.614 ; 98.654,86.639 100.178,86.639 ; 98.679,83.617 101.651,83.617 ; 98.679,86.665 100.178,86.665 ; 98.704,83.591 101.651,83.591 ; 98.704,86.69 100.178,86.69 ; 98.704,86.716 100.178,86.716 ; 98.73,83.566 101.651,83.566 ; 98.73,86.741 100.178,86.741 ; 98.755,83.541 101.651,83.541 ; 98.755,86.766 100.178,86.766 ; 98.755,86.792 100.178,86.792 ; 98.781,83.515 101.651,83.515 ; 98.781,85.547 99.847,85.547 ; 98.781,86.817 100.152,86.817 ; 98.806,83.49 101.651,83.49 ; 98.806,86.843 100.152,86.843 ; 98.831,83.439 101.651,83.439 ; 98.831,83.464 101.651,83.464 ; 98.831,85.573 99.898,85.573 ; 98.831,86.868 100.127,86.868 ; 98.831,86.893 100.101,86.893 ; 98.857,83.388 101.651,83.388 ; 98.857,83.414 101.651,83.414 ; 98.857,85.598 99.924,85.598 ; 98.857,86.919 100.076,86.919 ; 98.882,83.337 101.651,83.337 ; 98.882,83.363 101.651,83.363 ; 98.882,86.944 100.025,86.944 ; 98.882,86.97 100,86.97 ; 98.908,83.287 101.651,83.287 ; 98.908,83.312 101.651,83.312 ; 98.908,85.623 99.949,85.623 ; 98.908,86.995 99.974,86.995 ; 98.933,83.236 101.651,83.236 ; 98.933,83.261 101.651,83.261 ; 98.933,85.649 100,85.649 ; 98.933,87.02 99.949,87.02 ; 98.933,87.046 99.924,87.046 ; 98.958,81.788 101.6,81.788 ; 98.958,81.813 101.6,81.813 ; 98.958,81.839 101.6,81.839 ; 98.958,81.864 101.6,81.864 ; 98.958,81.89 101.6,81.89 ; 98.958,81.915 101.6,81.915 ; 98.958,81.94 101.6,81.94 ; 98.958,81.966 101.6,81.966 ; 98.958,81.991 101.6,81.991 ; 98.958,82.017 101.6,82.017 ; 98.958,82.042 101.6,82.042 ; 98.958,82.067 101.6,82.067 ; 98.958,82.093 101.6,82.093 ; 98.958,82.118 101.6,82.118 ; 98.958,82.144 101.6,82.144 ; 98.958,82.169 101.6,82.169 ; 98.958,82.194 101.6,82.194 ; 98.958,83.185 101.651,83.185 ; 98.958,83.21 101.651,83.21 ; 98.958,85.674 100.025,85.674 ; 98.958,87.071 99.924,87.071 ; 98.984,81.712 101.6,81.712 ; 98.984,81.737 101.6,81.737 ; 98.984,81.763 101.6,81.763 ; 98.984,82.22 101.6,82.22 ; 98.984,82.245 101.6,82.245 ; 98.984,83.109 101.651,83.109 ; 98.984,83.134 101.651,83.134 ; 98.984,83.16 101.651,83.16 ; 98.984,85.7 100.076,85.7 ; 98.984,87.097 99.898,87.097 ; 98.984,87.122 99.873,87.122 ; 99.009,83.033 101.651,83.033 ; 99.009,83.058 101.651,83.058 ; 99.009,83.083 101.651,83.083 ; 99.009,85.725 100.101,85.725 ; 99.009,87.147 99.847,87.147 ; 99.035,82.956 101.651,82.956 ; 99.035,82.982 101.651,82.982 ; 99.035,83.007 101.651,83.007 ; 99.035,87.173 99.822,87.173 ; 99.035,87.198 99.771,87.198 ; 99.06,82.88 101.651,82.88 ; 99.06,82.906 101.651,82.906 ; 99.06,82.931 101.651,82.931 ; 99.06,85.75 100.152,85.75 ; 99.06,87.224 99.746,87.224 ; 99.085,82.372 101.524,82.372 ; 99.085,82.398 101.549,82.398 ; 99.085,82.423 101.549,82.423 ; 99.085,82.448 101.575,82.448 ; 99.085,82.474 101.575,82.474 ; 99.085,82.499 101.6,82.499 ; 99.085,82.525 101.6,82.525 ; 99.085,82.55 101.6,82.55 ; 99.085,82.575 101.6,82.575 ; 99.085,82.601 101.6,82.601 ; 99.085,82.626 101.6,82.626 ; 99.085,82.652 101.6,82.652 ; 99.085,82.677 101.6,82.677 ; 99.085,82.702 101.6,82.702 ; 99.085,82.728 101.6,82.728 ; 99.085,82.753 101.6,82.753 ; 99.085,82.779 101.625,82.779 ; 99.085,82.804 101.625,82.804 ; 99.085,82.829 101.625,82.829 ; 99.085,82.855 101.651,82.855 ; 99.085,85.776 100.178,85.776 ; 99.111,85.801 100.228,85.801 ; 99.111,87.249 99.695,87.249 ; 99.136,82.347 101.524,82.347 ; 99.162,85.827 100.279,85.827 ; 99.162,87.274 99.67,87.274 ; 99.187,85.852 100.305,85.852 ; 99.212,87.3 99.644,87.3 ; 99.238,85.877 100.355,85.877 ; 99.263,85.903 100.381,85.903 ; 99.263,87.325 99.593,87.325 ; 99.289,85.928 100.432,85.928 ; 99.339,85.954 100.482,85.954 ; 99.365,85.979 100.508,85.979 ; 99.416,86.004 100.559,86.004 ; 99.441,86.03 100.609,86.03 ; 99.466,86.055 100.66,86.055 ; 99.517,86.081 100.686,86.081 ; 99.543,86.106 100.736,86.106 ; 99.568,86.131 100.787,86.131 ; 99.619,86.157 100.813,86.157 ; 99.644,86.182 100.813,86.182 ; 99.67,86.208 100.813,86.208 ; 99.72,86.233 100.813,86.233 ; 99.746,85.395 101.371,85.395 ; 99.771,85.42 101.371,85.42 ; 99.771,86.258 100.787,86.258 ; 99.797,85.446 101.371,85.446 ; 99.797,86.284 100.787,86.284 ; 99.822,85.471 101.346,85.471 ; 99.847,86.309 100.762,86.309 ; 99.873,85.496 101.346,85.496 ; 99.873,86.335 100.736,86.335 ; 99.898,85.522 101.346,85.522 ; 99.898,86.36 100.736,86.36 ; 99.924,85.547 101.321,85.547 ; 99.949,85.573 101.321,85.573 ; 99.949,86.385 100.711,86.385 ; 99.974,86.411 100.711,86.411 ; 100,85.598 101.295,85.598 ; 100.025,85.623 101.295,85.623 ; 100.025,86.436 100.686,86.436 ; 100.076,85.649 101.295,85.649 ; 100.076,86.462 100.66,86.462 ; 100.101,85.674 101.295,85.674 ; 100.127,86.487 100.66,86.487 ; 100.152,85.7 101.27,85.7 ; 100.152,86.512 100.609,86.512 ; 100.178,85.725 101.27,85.725 ; 100.178,86.538 100.584,86.538 ; 100.203,86.563 100.533,86.563 ; 100.203,86.817 101.194,86.817 ; 100.203,86.843 101.194,86.843 ; 100.203,86.868 101.194,86.868 ; 100.203,86.893 101.194,86.893 ; 100.203,86.919 101.194,86.919 ; 100.203,86.944 101.194,86.944 ; 100.203,86.97 101.194,86.97 ; 100.203,86.995 101.194,86.995 ; 100.203,87.02 101.168,87.02 ; 100.203,87.046 101.168,87.046 ; 100.203,87.071 101.168,87.071 ; 100.203,87.097 101.143,87.097 ; 100.203,87.122 101.143,87.122 ; 100.203,87.147 101.117,87.147 ; 100.203,87.173 101.117,87.173 ; 100.228,85.75 101.27,85.75 ; 100.228,86.589 100.482,86.589 ; 100.228,87.198 101.117,87.198 ; 100.228,87.224 101.092,87.224 ; 100.228,87.249 101.092,87.249 ; 100.254,87.274 101.067,87.274 ; 100.254,87.3 101.067,87.3 ; 100.279,85.776 101.244,85.776 ; 100.279,87.325 101.067,87.325 ; 100.305,87.351 101.041,87.351 ; 100.305,87.376 101.041,87.376 ; 100.33,85.801 101.244,85.801 ; 100.33,87.401 101.016,87.401 ; 100.355,85.827 101.219,85.827 ; 100.355,86.792 101.194,86.792 ; 100.355,87.427 100.99,87.427 ; 100.381,87.452 100.965,87.452 ; 100.406,85.852 101.219,85.852 ; 100.406,86.766 101.194,86.766 ; 100.432,86.741 101.194,86.741 ; 100.432,87.478 100.914,87.478 ; 100.457,85.877 101.194,85.877 ; 100.457,87.503 100.863,87.503 ; 100.482,86.716 101.194,86.716 ; 100.508,85.903 101.168,85.903 ; 100.508,87.528 100.838,87.528 ; 100.533,86.69 101.194,86.69 ; 100.559,85.928 101.143,85.928 ; 100.584,86.665 101.194,86.665 ; 100.609,85.954 101.117,85.954 ; 100.635,86.639 101.194,86.639 ; 100.686,85.979 101.092,85.979 ; 100.686,86.614 101.168,86.614 ; 100.711,86.589 101.168,86.589 ; 100.736,86.004 101.041,86.004 ; 100.736,86.563 101.168,86.563 ; 100.762,86.538 101.168,86.538 ; 100.787,86.512 101.143,86.512 ; 100.813,86.462 101.143,86.462 ; 100.813,86.487 101.143,86.487 ; 100.838,86.411 101.143,86.411 ; 100.838,86.436 101.143,86.436 ; 100.863,86.385 101.143,86.385 ; 100.889,86.335 101.143,86.335 ; 100.889,86.36 101.143,86.36 ; 100.914,86.309 101.143,86.309 ; 100.94,84.861 101.422,84.861 ; 100.94,86.284 101.143,86.284 ; 100.965,86.258 101.143,86.258 ; 100.99,84.404 101.422,84.404 ; 100.99,84.43 101.422,84.43 ; 100.99,84.455 101.422,84.455 ; 100.99,84.48 101.422,84.48 ; 100.99,84.506 101.422,84.506 ; 100.99,84.531 101.422,84.531 ; 100.99,84.557 101.422,84.557 ; 100.99,84.582 101.422,84.582 ; 100.99,84.607 101.422,84.607 ; 100.99,84.633 101.422,84.633 ; 100.99,84.658 101.422,84.658 ; 100.99,84.684 101.422,84.684 ; 100.99,84.709 101.422,84.709 ; 100.99,84.734 101.422,84.734 ; 100.99,84.76 101.422,84.76 ; 100.99,84.785 101.422,84.785 ; 100.99,84.811 101.422,84.811 ; 100.99,84.836 101.422,84.836 ; 100.99,86.182 101.143,86.182 ; 100.99,86.208 101.143,86.208 ; 100.99,86.233 101.143,86.233 ; 101.016,84.353 101.422,84.353 ; 101.016,84.379 101.422,84.379 ; 101.016,86.131 101.143,86.131 ; 101.016,86.157 101.143,86.157 ; 101.041,84.303 101.422,84.303 ; 101.041,84.328 101.422,84.328 ; 101.041,86.106 101.143,86.106 ; 101.143,84.277 101.422,84.277 ; 101.194,84.252 101.422,84.252 ; 101.27,84.226 101.422,84.226

## Polygon pours and split planes (outlines as drawn)
GND on Bottom Layer "Bottom Layer-No Net" (solid, pour order 2): 53.343,80.769 53.233,122.301 102.311,122.301 102.311,80.848
GND on Top Layer "Top Layer-No Net" (solid, pour order 0): 102.235,80.772 102.235,122.302 53.322,122.302 53.322,80.772

## Keep-outs
Keep-Out Layer:
  lines w0.3: 53.499,80.899 53.499,122.174 102.108,122.174 102.108,80.899 53.499,80.899

## Other copper
Top Layer:
  rectangle net VIN: 73.152,95.25 77.851,98.171
  pour cut-out: 73.025,95.25 78.232,95.25 78.102,98.552 73.025,98.552
  text "CORE" at 86.233,84.074 h1.52
  text "N.L" at 86.233,81.915 h1.52

## Silkscreen, mask and mechanical layers (free items; w line width, h text height)
Drill Drawing:
  text ".LEGEND" at 110.88,81.28 h1.52
  text "Drill Drawing." at 110.88,78.74 h1.52

## Dimensions
53.499,80.899 to 53.499,122.174 on Mechanical 1
53.499,80.899 to 102.108,80.899 on Mechanical 1

## Text inside footprints (layer, text, board x,y; h text height)
C6: Top Overlay "+" at 74.776,97.004 h0.5 r90
C7: Top Overlay "+" at 68.801,83.004 h0.5 r180
U2: Top Overlay "Antenna" at 59.851,114.929 h1.52